# EAGLE board SparkFun_6DoF_LSM6DSO-Panel (EAGLE 9.6.2), part 1 of 4
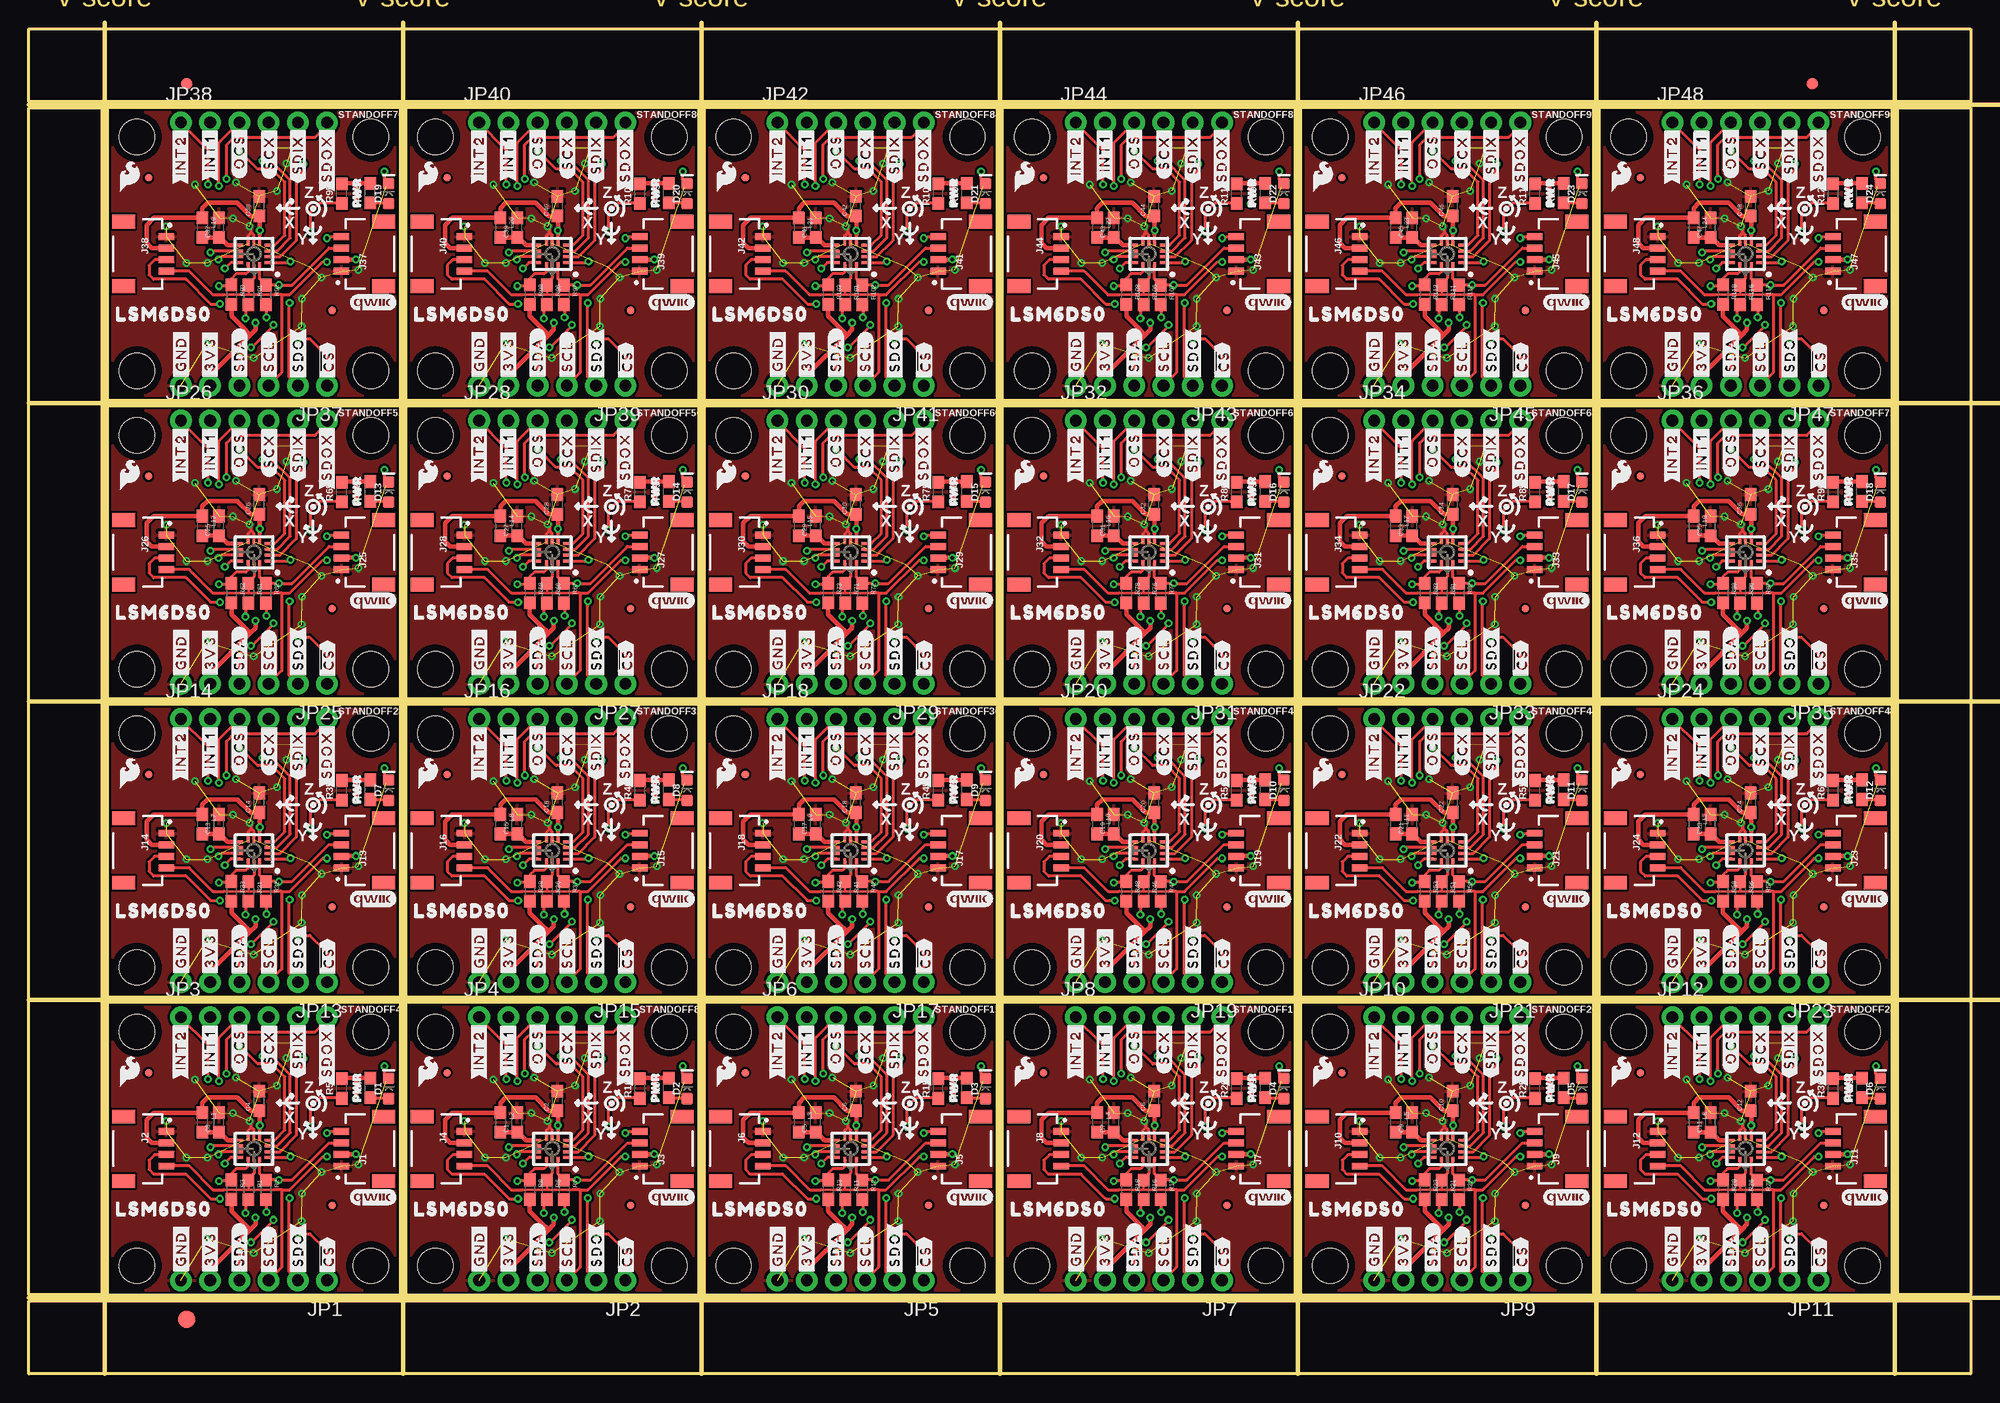
[diagram p0: board, top side]
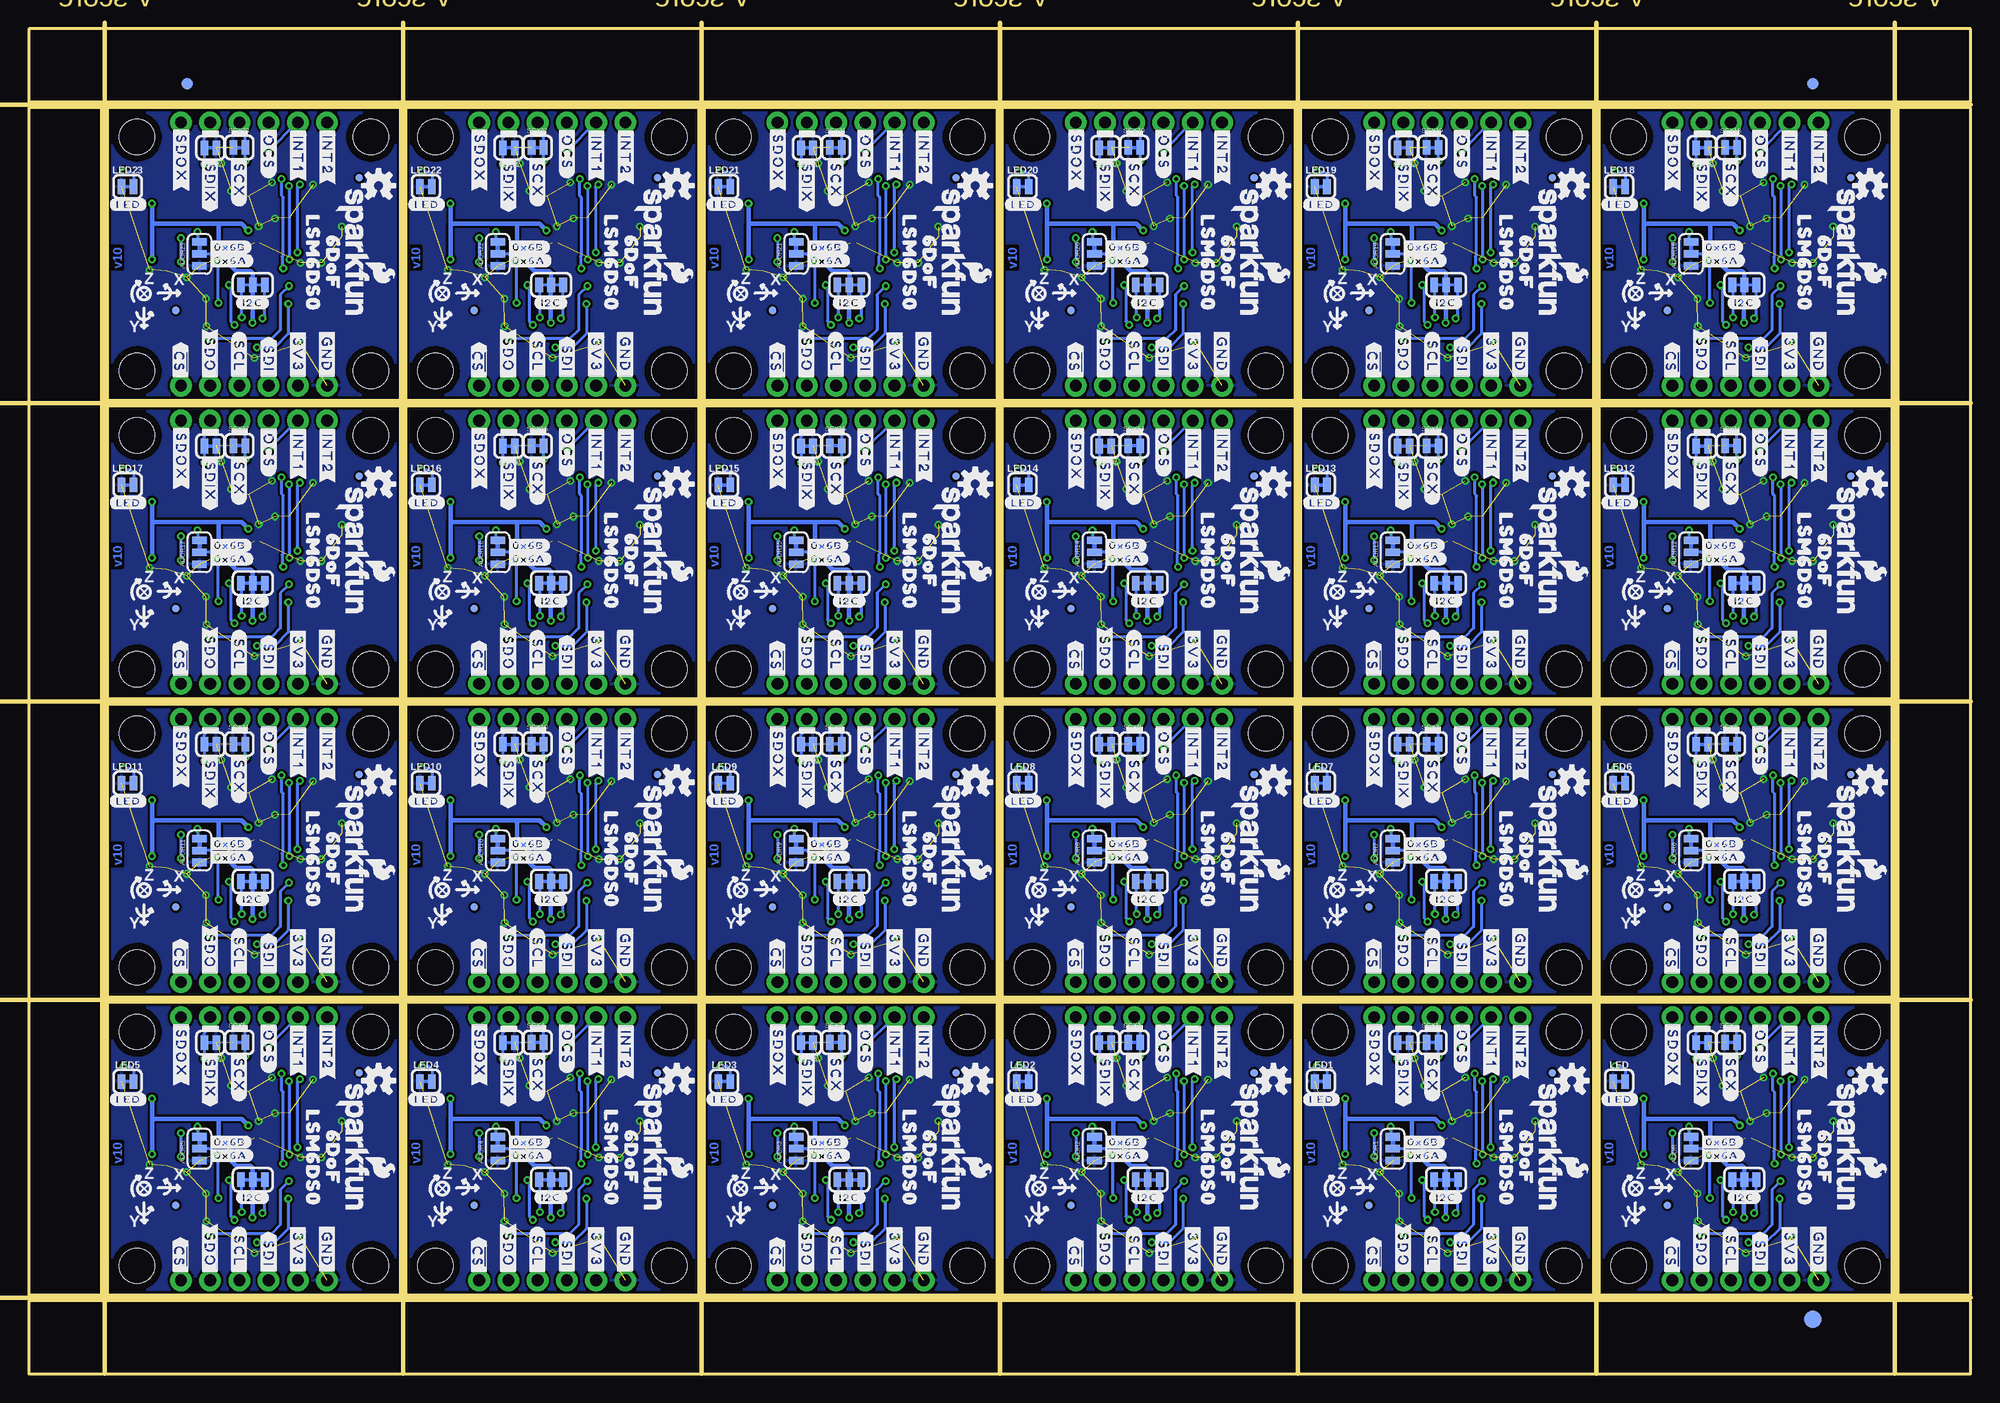
[diagram p1: board, bottom side, seen from below]

Size 168.66 x 116.84 mm. Coordinates in mm from the lower left corner, seen from the top.
Outline: 32.26,32.26 6.86,32.26 6.86,6.86 32.26,6.86 32.26,32.26
Outline: 58.17,32.26 32.77,32.26 32.77,6.86 58.17,6.86 58.17,32.26
Outline: 84.07,32.26 58.67,32.26 58.67,6.86 84.07,6.86 84.07,32.26
Outline: 109.98,32.26 84.58,32.26 84.58,6.86 109.98,6.86 109.98,32.26
Outline: 135.89,32.26 110.49,32.26 110.49,6.86 135.89,6.86 135.89,32.26
Outline: 161.8,32.26 136.4,32.26 136.4,6.86 161.8,6.86 161.8,32.26
Outline: 32.26,58.17 6.86,58.17 6.86,32.77 32.26,32.77 32.26,58.17
Outline: 58.17,58.17 32.77,58.17 32.77,32.77 58.17,32.77 58.17,58.17
Outline: 84.07,58.17 58.67,58.17 58.67,32.77 84.07,32.77 84.07,58.17
Outline: 109.98,58.17 84.58,58.17 84.58,32.77 109.98,32.77 109.98,58.17
Outline: 135.89,58.17 110.49,58.17 110.49,32.77 135.89,32.77 135.89,58.17
Outline: 161.8,58.17 136.4,58.17 136.4,32.77 161.8,32.77 161.8,58.17
Outline: 32.26,84.07 6.86,84.07 6.86,58.67 32.26,58.67 32.26,84.07
Outline: 58.17,84.07 32.77,84.07 32.77,58.67 58.17,58.67 58.17,84.07
Outline: 84.07,84.07 58.67,84.07 58.67,58.67 84.07,58.67 84.07,84.07
Outline: 109.98,84.07 84.58,84.07 84.58,58.67 109.98,58.67 109.98,84.07
Outline: 135.89,84.07 110.49,84.07 110.49,58.67 135.89,58.67 135.89,84.07
Outline: 161.8,84.07 136.4,84.07 136.4,58.67 161.8,58.67 161.8,84.07
Outline: 32.26,109.98 6.86,109.98 6.86,84.58 32.26,84.58 32.26,109.98
Outline: 58.17,109.98 32.77,109.98 32.77,84.58 58.17,84.58 58.17,109.98
Outline: 84.07,109.98 58.67,109.98 58.67,84.58 84.07,84.58 84.07,109.98
Outline: 109.98,109.98 84.58,109.98 84.58,84.58 109.98,84.58 109.98,109.98
Outline: 135.89,109.98 110.49,109.98 110.49,84.58 135.89,84.58 135.89,109.98
Outline: 161.8,109.98 136.4,109.98 136.4,84.58 161.8,84.58 161.8,109.98
Outline: 0,6.35 168.66,6.35 168.66,0 0,0 0,6.35
Outline: 162.31,109.98 168.66,109.98 168.66,6.86 162.31,6.86 162.31,109.98
Outline: 0,116.84 168.66,116.84 168.66,110.49 0,110.49 0,116.84
Outline: 0,109.98 6.35,109.98 6.35,6.86 0,6.86 0,109.98
Copper layers (1*16): Top 0.035mm / dielectric 1.5mm / Bottom 0.035mm
Design rules "SparkFun_6DoF_LSM6DSO": minimum track width 7mil, minimum drill 0.3mm, track to track 7mil, track to pad 7mil, pad to pad 7mil, via to via 7mil, smd to smd 7mil, copper to edge 7mil, drill to drill 7mil, minimum pad ring 7mil, minimum via ring 7mil, stop-mask expansion 3mil, vias tented up to drill 25mil, thermal gap 10mil
Milling: 12 lines

## Footprints (pad centres in the part's own frame; a part is rotated, then mirrored left to right if it is on the bottom)
SMT-JUMPER_3_1-NC_TRACE_SILK = smd 0.66 x 1.27: 1 -1.041,0; 2 0,0; 3 1.041,0
0603 = smd 1.1 x 1: 1 -0.85,0; 2 0.85,0
LED-0603 = smd 1 x 1: A -0.877,0; C 0.877,0
FIDUCIAL-1X2 = smd 1 x 1: 1 0,0
FIDUCIAL-1.5X3 = smd 1.5 x 1.5: 1 0,0
FIDUCIAL-MICRO = smd 0.635 x 0.635: 1 0,0
SMT-JUMPER_3_2-NC_TRACE_SILK = smd 0.66 x 1.27: 1 -1.041,0; 2 0,0; 3 1.041,0
JST04_1MM_RA = smd 0.6 x 1.35: 1 -1.5,0; 2 -0.5,0; 3 0.5,0; 4 1.5,0 | smd 1.2 x 2: NC1 2.8,-3.675; NC2 -2.8,-3.675
1X06_NO_SILK = drill 1.016 pad 1.88: 1 0,0; 2 2.54,0; 3 5.08,0; 4 7.62,0; 5 10.16,0; 6 12.7,0
SMT-JUMPER_2_NC_TRACE_SILK = smd 0.66 x 1.27: 1 -0.521,0; 2 0.521,0
STAND-OFF-TIGHT = hole 3.048: 0,0
LGA14L = smd 0.45 x 0.25: 1 -1.175,0.75; 2 -1.175,0.25; 3 -1.175,-0.25; 4 -1.175,-0.75; 8 1.175,-0.75; 9 1.175,-0.25; 10 1.175,0.25; 11 1.175,0.75 | smd 0.25 x 0.45: 5 -0.5,-0.925; 6 0,-0.925; 7 0.5,-0.925; 12 0.5,0.925; 13 0,0.925; 14 -0.5,0.925

## Placement (x,y rotation side)
ADDR  JUMPER-SMT_3_1-NC_TRACE_SILK  [SMT-JUMPER_3_1-NC_TRACE_SILK]  24.29,19.56 90 bottom
ADDR1  JUMPER-SMT_3_1-NC_TRACE_SILK  [SMT-JUMPER_3_1-NC_TRACE_SILK]  50.2,19.56 90 bottom
ADDR2  JUMPER-SMT_3_1-NC_TRACE_SILK  [SMT-JUMPER_3_1-NC_TRACE_SILK]  76.1,19.56 90 bottom
ADDR3  JUMPER-SMT_3_1-NC_TRACE_SILK  [SMT-JUMPER_3_1-NC_TRACE_SILK]  102.01,19.56 90 bottom
ADDR4  JUMPER-SMT_3_1-NC_TRACE_SILK  [SMT-JUMPER_3_1-NC_TRACE_SILK]  127.92,19.56 90 bottom
ADDR5  JUMPER-SMT_3_1-NC_TRACE_SILK  [SMT-JUMPER_3_1-NC_TRACE_SILK]  153.83,19.56 90 bottom
ADDR6  JUMPER-SMT_3_1-NC_TRACE_SILK  [SMT-JUMPER_3_1-NC_TRACE_SILK]  24.29,45.47 90 bottom
ADDR7  JUMPER-SMT_3_1-NC_TRACE_SILK  [SMT-JUMPER_3_1-NC_TRACE_SILK]  50.2,45.47 90 bottom
ADDR8  JUMPER-SMT_3_1-NC_TRACE_SILK  [SMT-JUMPER_3_1-NC_TRACE_SILK]  76.1,45.47 90 bottom
ADDR9  JUMPER-SMT_3_1-NC_TRACE_SILK  [SMT-JUMPER_3_1-NC_TRACE_SILK]  102.01,45.47 90 bottom
ADDR10  JUMPER-SMT_3_1-NC_TRACE_SILK  [SMT-JUMPER_3_1-NC_TRACE_SILK]  127.92,45.47 90 bottom
ADDR11  JUMPER-SMT_3_1-NC_TRACE_SILK  [SMT-JUMPER_3_1-NC_TRACE_SILK]  153.83,45.47 90 bottom
ADDR12  JUMPER-SMT_3_1-NC_TRACE_SILK  [SMT-JUMPER_3_1-NC_TRACE_SILK]  24.29,71.37 90 bottom
ADDR13  JUMPER-SMT_3_1-NC_TRACE_SILK  [SMT-JUMPER_3_1-NC_TRACE_SILK]  50.2,71.37 90 bottom
ADDR14  JUMPER-SMT_3_1-NC_TRACE_SILK  [SMT-JUMPER_3_1-NC_TRACE_SILK]  76.1,71.37 90 bottom
ADDR15  JUMPER-SMT_3_1-NC_TRACE_SILK  [SMT-JUMPER_3_1-NC_TRACE_SILK]  102.01,71.37 90 bottom
ADDR16  JUMPER-SMT_3_1-NC_TRACE_SILK  [SMT-JUMPER_3_1-NC_TRACE_SILK]  127.92,71.37 90 bottom
ADDR17  JUMPER-SMT_3_1-NC_TRACE_SILK  [SMT-JUMPER_3_1-NC_TRACE_SILK]  153.83,71.37 90 bottom
ADDR18  JUMPER-SMT_3_1-NC_TRACE_SILK  [SMT-JUMPER_3_1-NC_TRACE_SILK]  24.29,97.28 90 bottom
ADDR19  JUMPER-SMT_3_1-NC_TRACE_SILK  [SMT-JUMPER_3_1-NC_TRACE_SILK]  50.2,97.28 90 bottom
ADDR20  JUMPER-SMT_3_1-NC_TRACE_SILK  [SMT-JUMPER_3_1-NC_TRACE_SILK]  76.1,97.28 90 bottom
ADDR21  JUMPER-SMT_3_1-NC_TRACE_SILK  [SMT-JUMPER_3_1-NC_TRACE_SILK]  102.01,97.28 90 bottom
ADDR22  JUMPER-SMT_3_1-NC_TRACE_SILK  [SMT-JUMPER_3_1-NC_TRACE_SILK]  127.92,97.28 90 bottom
ADDR23  JUMPER-SMT_3_1-NC_TRACE_SILK  [SMT-JUMPER_3_1-NC_TRACE_SILK]  153.83,97.28 90 bottom
C1  0.1uF  [0603]  42.43,21.84 90 top
C2  0.1uF  [0603]  45.92,23.71 90 top
C3  0.1uF  [0603]  16.52,21.84 90 top
C4  0.1uF  [0603]  20.02,23.71 90 top
C5  0.1uF  [0603]  68.34,21.84 90 top
C6  0.1uF  [0603]  71.83,23.71 90 top
C7  0.1uF  [0603]  94.25,21.84 90 top
C8  0.1uF  [0603]  97.74,23.71 90 top
C9  0.1uF  [0603]  120.15,21.84 90 top
C10  0.1uF  [0603]  123.65,23.71 90 top
C11  0.1uF  [0603]  146.06,21.84 90 top
C12  0.1uF  [0603]  149.56,23.71 90 top
C13  0.1uF  [0603]  16.52,47.75 90 top
C14  0.1uF  [0603]  20.02,49.62 90 top
C15  0.1uF  [0603]  42.43,47.75 90 top
C16  0.1uF  [0603]  45.92,49.62 90 top
C17  0.1uF  [0603]  68.34,47.75 90 top
C18  0.1uF  [0603]  71.83,49.62 90 top
C19  0.1uF  [0603]  94.25,47.75 90 top
C20  0.1uF  [0603]  97.74,49.62 90 top
C21  0.1uF  [0603]  120.15,47.75 90 top
C22  0.1uF  [0603]  123.65,49.62 90 top
C23  0.1uF  [0603]  146.06,47.75 90 top
C24  0.1uF  [0603]  149.56,49.62 90 top
C25  0.1uF  [0603]  16.52,73.66 90 top
C26  0.1uF  [0603]  20.02,75.53 90 top
C27  0.1uF  [0603]  42.43,73.66 90 top
C28  0.1uF  [0603]  45.92,75.53 90 top
C29  0.1uF  [0603]  68.34,73.66 90 top
C30  0.1uF  [0603]  71.83,75.53 90 top
C31  0.1uF  [0603]  94.25,73.66 90 top
C32  0.1uF  [0603]  97.74,75.53 90 top
C33  0.1uF  [0603]  120.15,73.66 90 top
C34  0.1uF  [0603]  123.65,75.53 90 top
C35  0.1uF  [0603]  146.06,73.66 90 top
C36  0.1uF  [0603]  149.56,75.53 90 top
C37  0.1uF  [0603]  16.52,99.57 90 top
C38  0.1uF  [0603]  20.02,101.43 90 top
C39  0.1uF  [0603]  42.43,99.57 90 top
C40  0.1uF  [0603]  45.92,101.43 90 top
C41  0.1uF  [0603]  68.34,99.57 90 top
C42  0.1uF  [0603]  71.83,101.43 90 top
C43  0.1uF  [0603]  94.25,99.57 90 top
C44  0.1uF  [0603]  97.74,101.43 90 top
C45  0.1uF  [0603]  120.15,99.57 90 top
C46  0.1uF  [0603]  123.65,101.43 90 top
C47  0.1uF  [0603]  146.06,99.57 90 top
C48  0.1uF  [0603]  149.56,101.43 90 top
D1  [LED-0603]  31.27,24.79 90 top
D2  [LED-0603]  57.18,24.79 90 top
D3  [LED-0603]  83.08,24.79 90 top
D4  [LED-0603]  108.99,24.79 90 top
D5  [LED-0603]  134.9,24.79 90 top
D6  [LED-0603]  160.81,24.79 90 top
D7  [LED-0603]  31.27,50.7 90 top
D8  [LED-0603]  57.18,50.7 90 top
D9  [LED-0603]  83.08,50.7 90 top
D10  [LED-0603]  108.99,50.7 90 top
D11  [LED-0603]  134.9,50.7 90 top
D12  [LED-0603]  160.81,50.7 90 top
D13  [LED-0603]  31.27,76.61 90 top
D14  [LED-0603]  57.18,76.61 90 top
D15  [LED-0603]  83.08,76.61 90 top
D16  [LED-0603]  108.99,76.61 90 top
D17  [LED-0603]  134.9,76.61 90 top
D18  [LED-0603]  160.81,76.61 90 top
D19  [LED-0603]  31.27,102.51 90 top
D20  [LED-0603]  57.18,102.51 90 top
D21  [LED-0603]  83.08,102.51 90 top
D22  [LED-0603]  108.99,102.51 90 top
D23  [LED-0603]  134.9,102.51 90 top
D24  [LED-0603]  160.81,102.51 90 top
E$1  [FIDUCIAL-1X2]  13.72,112.08 0 top
E$2  [FIDUCIAL-1X2]  13.72,112.08 0 bottom
E$3  [FIDUCIAL-1X2]  154.88,112.08 0 top
E$4  [FIDUCIAL-1X2]  154.88,112.08 0 bottom
E$5  [FIDUCIAL-1.5X3]  13.72,4.76 0 top
E$6  [FIDUCIAL-1.5X3]  13.72,4.76 0 bottom
FD1  FIDUCIALUFIDUCIAL  [FIDUCIAL-MICRO]  10.41,26.16 0 bottom
FD2  FIDUCIALUFIDUCIAL  [FIDUCIAL-MICRO]  26.34,14.66 0 bottom
FD3  FIDUCIALUFIDUCIAL  [FIDUCIAL-MICRO]  36.32,26.16 0 bottom
FD4  FIDUCIALUFIDUCIAL  [FIDUCIAL-MICRO]  52.25,14.66 0 bottom
FD5  FIDUCIALUFIDUCIAL  [FIDUCIAL-MICRO]  62.23,26.16 0 bottom
FD6  FIDUCIALUFIDUCIAL  [FIDUCIAL-MICRO]  78.16,14.66 0 bottom
FD7  FIDUCIALUFIDUCIAL  [FIDUCIAL-MICRO]  88.14,26.16 0 bottom
FD8  FIDUCIALUFIDUCIAL  [FIDUCIAL-MICRO]  104.06,14.66 0 bottom
FD9  FIDUCIALUFIDUCIAL  [FIDUCIAL-MICRO]  114.05,26.16 0 bottom
FD10  FIDUCIALUFIDUCIAL  [FIDUCIAL-MICRO]  129.97,14.66 0 bottom
FD11  FIDUCIALUFIDUCIAL  [FIDUCIAL-MICRO]  139.95,26.16 0 bottom
FD12  FIDUCIALUFIDUCIAL  [FIDUCIAL-MICRO]  155.88,14.66 0 bottom
FD13  FIDUCIALUFIDUCIAL  [FIDUCIAL-MICRO]  10.41,52.07 0 bottom
FD14  FIDUCIALUFIDUCIAL  [FIDUCIAL-MICRO]  26.34,40.56 0 bottom
FD15  FIDUCIALUFIDUCIAL  [FIDUCIAL-MICRO]  36.32,52.07 0 bottom
FD16  FIDUCIALUFIDUCIAL  [FIDUCIAL-MICRO]  52.25,40.56 0 bottom
FD17  FIDUCIALUFIDUCIAL  [FIDUCIAL-MICRO]  62.23,52.07 0 bottom
FD18  FIDUCIALUFIDUCIAL  [FIDUCIAL-MICRO]  78.16,40.56 0 bottom
FD19  FIDUCIALUFIDUCIAL  [FIDUCIAL-MICRO]  88.14,52.07 0 bottom
FD20  FIDUCIALUFIDUCIAL  [FIDUCIAL-MICRO]  104.06,40.56 0 bottom
FD21  FIDUCIALUFIDUCIAL  [FIDUCIAL-MICRO]  114.05,52.07 0 bottom
FD22  FIDUCIALUFIDUCIAL  [FIDUCIAL-MICRO]  129.97,40.56 0 bottom
FD23  FIDUCIALUFIDUCIAL  [FIDUCIAL-MICRO]  139.95,52.07 0 bottom
FD24  FIDUCIALUFIDUCIAL  [FIDUCIAL-MICRO]  155.88,40.56 0 bottom
FD25  FIDUCIALUFIDUCIAL  [FIDUCIAL-MICRO]  10.41,77.98 0 bottom
FD26  FIDUCIALUFIDUCIAL  [FIDUCIAL-MICRO]  26.34,66.47 0 bottom
FD27  FIDUCIALUFIDUCIAL  [FIDUCIAL-MICRO]  36.32,77.98 0 bottom
FD28  FIDUCIALUFIDUCIAL  [FIDUCIAL-MICRO]  52.25,66.47 0 bottom
FD29  FIDUCIALUFIDUCIAL  [FIDUCIAL-MICRO]  62.23,77.98 0 bottom
FD30  FIDUCIALUFIDUCIAL  [FIDUCIAL-MICRO]  78.16,66.47 0 bottom
FD31  FIDUCIALUFIDUCIAL  [FIDUCIAL-MICRO]  88.14,77.98 0 bottom
FD32  FIDUCIALUFIDUCIAL  [FIDUCIAL-MICRO]  104.06,66.47 0 bottom
FD33  FIDUCIALUFIDUCIAL  [FIDUCIAL-MICRO]  114.05,77.98 0 bottom
FD34  FIDUCIALUFIDUCIAL  [FIDUCIAL-MICRO]  129.97,66.47 0 bottom
FD35  FIDUCIALUFIDUCIAL  [FIDUCIAL-MICRO]  139.95,77.98 0 bottom
FD36  FIDUCIALUFIDUCIAL  [FIDUCIAL-MICRO]  155.88,66.47 0 bottom
FD37  FIDUCIALUFIDUCIAL  [FIDUCIAL-MICRO]  10.41,103.89 0 bottom
FD38  FIDUCIALUFIDUCIAL  [FIDUCIAL-MICRO]  26.34,92.38 0 bottom
FD39  FIDUCIALUFIDUCIAL  [FIDUCIAL-MICRO]  36.32,103.89 0 bottom
FD40  FIDUCIALUFIDUCIAL  [FIDUCIAL-MICRO]  52.25,92.38 0 bottom
FD41  FIDUCIALUFIDUCIAL  [FIDUCIAL-MICRO]  62.23,103.89 0 bottom
FD42  FIDUCIALUFIDUCIAL  [FIDUCIAL-MICRO]  78.16,92.38 0 bottom
FD43  FIDUCIALUFIDUCIAL  [FIDUCIAL-MICRO]  88.14,103.89 0 bottom
FD44  FIDUCIALUFIDUCIAL  [FIDUCIAL-MICRO]  104.06,92.38 0 bottom
FD45  FIDUCIALUFIDUCIAL  [FIDUCIAL-MICRO]  114.05,103.89 0 bottom
FD46  FIDUCIALUFIDUCIAL  [FIDUCIAL-MICRO]  129.97,92.38 0 bottom
FD47  FIDUCIALUFIDUCIAL  [FIDUCIAL-MICRO]  139.95,103.89 0 bottom
FD48  FIDUCIALUFIDUCIAL  [FIDUCIAL-MICRO]  155.88,92.38 0 bottom
FID1  FIDUCIALUFIDUCIAL  [FIDUCIAL-MICRO]  10.41,26.16 0 top
FID2  FIDUCIALUFIDUCIAL  [FIDUCIAL-MICRO]  26.34,14.66 0 top
FID3  FIDUCIALUFIDUCIAL  [FIDUCIAL-MICRO]  36.32,26.16 0 top
FID4  FIDUCIALUFIDUCIAL  [FIDUCIAL-MICRO]  52.25,14.66 0 top
FID5  FIDUCIALUFIDUCIAL  [FIDUCIAL-MICRO]  62.23,26.16 0 top
FID6  FIDUCIALUFIDUCIAL  [FIDUCIAL-MICRO]  78.16,14.66 0 top
FID7  FIDUCIALUFIDUCIAL  [FIDUCIAL-MICRO]  88.14,26.16 0 top
FID8  FIDUCIALUFIDUCIAL  [FIDUCIAL-MICRO]  104.06,14.66 0 top
FID9  FIDUCIALUFIDUCIAL  [FIDUCIAL-MICRO]  114.05,26.16 0 top
FID10  FIDUCIALUFIDUCIAL  [FIDUCIAL-MICRO]  129.97,14.66 0 top
FID11  FIDUCIALUFIDUCIAL  [FIDUCIAL-MICRO]  139.95,26.16 0 top
FID12  FIDUCIALUFIDUCIAL  [FIDUCIAL-MICRO]  155.88,14.66 0 top
FID13  FIDUCIALUFIDUCIAL  [FIDUCIAL-MICRO]  10.41,52.07 0 top
FID14  FIDUCIALUFIDUCIAL  [FIDUCIAL-MICRO]  26.34,40.56 0 top
FID15  FIDUCIALUFIDUCIAL  [FIDUCIAL-MICRO]  36.32,52.07 0 top
FID16  FIDUCIALUFIDUCIAL  [FIDUCIAL-MICRO]  52.25,40.56 0 top
FID17  FIDUCIALUFIDUCIAL  [FIDUCIAL-MICRO]  62.23,52.07 0 top
FID18  FIDUCIALUFIDUCIAL  [FIDUCIAL-MICRO]  78.16,40.56 0 top
FID19  FIDUCIALUFIDUCIAL  [FIDUCIAL-MICRO]  88.14,52.07 0 top
FID20  FIDUCIALUFIDUCIAL  [FIDUCIAL-MICRO]  104.06,40.56 0 top
FID21  FIDUCIALUFIDUCIAL  [FIDUCIAL-MICRO]  114.05,52.07 0 top
FID22  FIDUCIALUFIDUCIAL  [FIDUCIAL-MICRO]  129.97,40.56 0 top
FID23  FIDUCIALUFIDUCIAL  [FIDUCIAL-MICRO]  139.95,52.07 0 top
FID24  FIDUCIALUFIDUCIAL  [FIDUCIAL-MICRO]  155.88,40.56 0 top
FID25  FIDUCIALUFIDUCIAL  [FIDUCIAL-MICRO]  10.41,77.98 0 top
FID26  FIDUCIALUFIDUCIAL  [FIDUCIAL-MICRO]  26.34,66.47 0 top
FID27  FIDUCIALUFIDUCIAL  [FIDUCIAL-MICRO]  36.32,77.98 0 top
FID28  FIDUCIALUFIDUCIAL  [FIDUCIAL-MICRO]  52.25,66.47 0 top
FID29  FIDUCIALUFIDUCIAL  [FIDUCIAL-MICRO]  62.23,77.98 0 top
FID30  FIDUCIALUFIDUCIAL  [FIDUCIAL-MICRO]  78.16,66.47 0 top
FID31  FIDUCIALUFIDUCIAL  [FIDUCIAL-MICRO]  88.14,77.98 0 top
FID32  FIDUCIALUFIDUCIAL  [FIDUCIAL-MICRO]  104.06,66.47 0 top
FID33  FIDUCIALUFIDUCIAL  [FIDUCIAL-MICRO]  114.05,77.98 0 top
FID34  FIDUCIALUFIDUCIAL  [FIDUCIAL-MICRO]  129.97,66.47 0 top
FID35  FIDUCIALUFIDUCIAL  [FIDUCIAL-MICRO]  139.95,77.98 0 top
FID36  FIDUCIALUFIDUCIAL  [FIDUCIAL-MICRO]  155.88,66.47 0 top
FID37  FIDUCIALUFIDUCIAL  [FIDUCIAL-MICRO]  10.41,103.89 0 top
FID38  FIDUCIALUFIDUCIAL  [FIDUCIAL-MICRO]  26.34,92.38 0 top
FID39  FIDUCIALUFIDUCIAL  [FIDUCIAL-MICRO]  36.32,103.89 0 top
FID40  FIDUCIALUFIDUCIAL  [FIDUCIAL-MICRO]  52.25,92.38 0 top
FID41  FIDUCIALUFIDUCIAL  [FIDUCIAL-MICRO]  62.23,103.89 0 top
FID42  FIDUCIALUFIDUCIAL  [FIDUCIAL-MICRO]  78.16,92.38 0 top
FID43  FIDUCIALUFIDUCIAL  [FIDUCIAL-MICRO]  88.14,103.89 0 top
FID44  FIDUCIALUFIDUCIAL  [FIDUCIAL-MICRO]  104.06,92.38 0 top
FID45  FIDUCIALUFIDUCIAL  [FIDUCIAL-MICRO]  114.05,103.89 0 top
FID46  FIDUCIALUFIDUCIAL  [FIDUCIAL-MICRO]  129.97,92.38 0 top
FID47  FIDUCIALUFIDUCIAL  [FIDUCIAL-MICRO]  139.95,103.89 0 top
FID48  FIDUCIALUFIDUCIAL  [FIDUCIAL-MICRO]  155.88,92.38 0 top
I2C_PU  S_MODE  [SMT-JUMPER_3_2-NC_TRACE_SILK]  19.66,16.87 180 bottom
I2C_PU1  S_MODE  [SMT-JUMPER_3_2-NC_TRACE_SILK]  45.57,16.87 180 bottom
I2C_PU2  S_MODE  [SMT-JUMPER_3_2-NC_TRACE_SILK]  71.48,16.87 180 bottom
I2C_PU3  S_MODE  [SMT-JUMPER_3_2-NC_TRACE_SILK]  97.38,16.87 180 bottom
I2C_PU4  S_MODE  [SMT-JUMPER_3_2-NC_TRACE_SILK]  123.29,16.87 180 bottom
I2C_PU5  S_MODE  [SMT-JUMPER_3_2-NC_TRACE_SILK]  149.2,16.87 180 bottom
I2C_PU6  S_MODE  [SMT-JUMPER_3_2-NC_TRACE_SILK]  19.66,42.78 180 bottom
I2C_PU7  S_MODE  [SMT-JUMPER_3_2-NC_TRACE_SILK]  45.57,42.78 180 bottom
I2C_PU8  S_MODE  [SMT-JUMPER_3_2-NC_TRACE_SILK]  71.48,42.78 180 bottom
I2C_PU9  S_MODE  [SMT-JUMPER_3_2-NC_TRACE_SILK]  97.38,42.78 180 bottom
I2C_PU10  S_MODE  [SMT-JUMPER_3_2-NC_TRACE_SILK]  123.29,42.78 180 bottom
I2C_PU11  S_MODE  [SMT-JUMPER_3_2-NC_TRACE_SILK]  149.2,42.78 180 bottom
I2C_PU12  S_MODE  [SMT-JUMPER_3_2-NC_TRACE_SILK]  19.66,68.69 180 bottom
I2C_PU13  S_MODE  [SMT-JUMPER_3_2-NC_TRACE_SILK]  45.57,68.69 180 bottom
I2C_PU14  S_MODE  [SMT-JUMPER_3_2-NC_TRACE_SILK]  71.48,68.69 180 bottom
I2C_PU15  S_MODE  [SMT-JUMPER_3_2-NC_TRACE_SILK]  97.38,68.69 180 bottom
I2C_PU16  S_MODE  [SMT-JUMPER_3_2-NC_TRACE_SILK]  123.29,68.69 180 bottom
I2C_PU17  S_MODE  [SMT-JUMPER_3_2-NC_TRACE_SILK]  149.2,68.69 180 bottom
I2C_PU18  S_MODE  [SMT-JUMPER_3_2-NC_TRACE_SILK]  19.66,94.6 180 bottom
I2C_PU19  S_MODE  [SMT-JUMPER_3_2-NC_TRACE_SILK]  45.57,94.6 180 bottom
I2C_PU20  S_MODE  [SMT-JUMPER_3_2-NC_TRACE_SILK]  71.48,94.6 180 bottom
I2C_PU21  S_MODE  [SMT-JUMPER_3_2-NC_TRACE_SILK]  97.38,94.6 180 bottom
I2C_PU22  S_MODE  [SMT-JUMPER_3_2-NC_TRACE_SILK]  123.29,94.6 180 bottom
I2C_PU23  S_MODE  [SMT-JUMPER_3_2-NC_TRACE_SILK]  149.2,94.6 180 bottom
J1  QWIIC_RIGHT_ANGLE  [JST04_1MM_RA]  27.15,19.56 90 top
J2  QWIIC_RIGHT_ANGLE  [JST04_1MM_RA]  11.94,19.56 270 top
J3  QWIIC_RIGHT_ANGLE  [JST04_1MM_RA]  53.06,19.56 90 top
J4  QWIIC_RIGHT_ANGLE  [JST04_1MM_RA]  37.85,19.56 270 top
J5  QWIIC_RIGHT_ANGLE  [JST04_1MM_RA]  78.97,19.56 90 top
J6  QWIIC_RIGHT_ANGLE  [JST04_1MM_RA]  63.75,19.56 270 top
J7  QWIIC_RIGHT_ANGLE  [JST04_1MM_RA]  104.88,19.56 90 top
J8  QWIIC_RIGHT_ANGLE  [JST04_1MM_RA]  89.66,19.56 270 top
J9  QWIIC_RIGHT_ANGLE  [JST04_1MM_RA]  130.78,19.56 90 top
J10  QWIIC_RIGHT_ANGLE  [JST04_1MM_RA]  115.57,19.56 270 top
J11  QWIIC_RIGHT_ANGLE  [JST04_1MM_RA]  156.69,19.56 90 top
J12  QWIIC_RIGHT_ANGLE  [JST04_1MM_RA]  141.48,19.56 270 top
J13  QWIIC_RIGHT_ANGLE  [JST04_1MM_RA]  27.15,45.47 90 top
J14  QWIIC_RIGHT_ANGLE  [JST04_1MM_RA]  11.94,45.47 270 top
J15  QWIIC_RIGHT_ANGLE  [JST04_1MM_RA]  53.06,45.47 90 top
J16  QWIIC_RIGHT_ANGLE  [JST04_1MM_RA]  37.85,45.47 270 top
J17  QWIIC_RIGHT_ANGLE  [JST04_1MM_RA]  78.97,45.47 90 top
J18  QWIIC_RIGHT_ANGLE  [JST04_1MM_RA]  63.75,45.47 270 top
J19  QWIIC_RIGHT_ANGLE  [JST04_1MM_RA]  104.88,45.47 90 top
J20  QWIIC_RIGHT_ANGLE  [JST04_1MM_RA]  89.66,45.47 270 top
J21  QWIIC_RIGHT_ANGLE  [JST04_1MM_RA]  130.78,45.47 90 top
J22  QWIIC_RIGHT_ANGLE  [JST04_1MM_RA]  115.57,45.47 270 top
J23  QWIIC_RIGHT_ANGLE  [JST04_1MM_RA]  156.69,45.47 90 top
J24  QWIIC_RIGHT_ANGLE  [JST04_1MM_RA]  141.48,45.47 270 top
J25  QWIIC_RIGHT_ANGLE  [JST04_1MM_RA]  27.15,71.37 90 top
J26  QWIIC_RIGHT_ANGLE  [JST04_1MM_RA]  11.94,71.37 270 top
J27  QWIIC_RIGHT_ANGLE  [JST04_1MM_RA]  53.06,71.37 90 top
J28  QWIIC_RIGHT_ANGLE  [JST04_1MM_RA]  37.85,71.37 270 top
J29  QWIIC_RIGHT_ANGLE  [JST04_1MM_RA]  78.97,71.37 90 top
J30  QWIIC_RIGHT_ANGLE  [JST04_1MM_RA]  63.75,71.37 270 top
J31  QWIIC_RIGHT_ANGLE  [JST04_1MM_RA]  104.88,71.37 90 top
J32  QWIIC_RIGHT_ANGLE  [JST04_1MM_RA]  89.66,71.37 270 top
J33  QWIIC_RIGHT_ANGLE  [JST04_1MM_RA]  130.78,71.37 90 top
J34  QWIIC_RIGHT_ANGLE  [JST04_1MM_RA]  115.57,71.37 270 top
J35  QWIIC_RIGHT_ANGLE  [JST04_1MM_RA]  156.69,71.37 90 top
J36  QWIIC_RIGHT_ANGLE  [JST04_1MM_RA]  141.48,71.37 270 top
J37  QWIIC_RIGHT_ANGLE  [JST04_1MM_RA]  27.15,97.28 90 top
J38  QWIIC_RIGHT_ANGLE  [JST04_1MM_RA]  11.94,97.28 270 top
J39  QWIIC_RIGHT_ANGLE  [JST04_1MM_RA]  53.06,97.28 90 top
J40  QWIIC_RIGHT_ANGLE  [JST04_1MM_RA]  37.85,97.28 270 top
J41  QWIIC_RIGHT_ANGLE  [JST04_1MM_RA]  78.97,97.28 90 top
J42  QWIIC_RIGHT_ANGLE  [JST04_1MM_RA]  63.75,97.28 270 top
J43  QWIIC_RIGHT_ANGLE  [JST04_1MM_RA]  104.88,97.28 90 top
J44  QWIIC_RIGHT_ANGLE  [JST04_1MM_RA]  89.66,97.28 270 top
J45  QWIIC_RIGHT_ANGLE  [JST04_1MM_RA]  130.78,97.28 90 top
J46  QWIIC_RIGHT_ANGLE  [JST04_1MM_RA]  115.57,97.28 270 top
J47  QWIIC_RIGHT_ANGLE  [JST04_1MM_RA]  156.69,97.28 90 top
J48  QWIIC_RIGHT_ANGLE  [JST04_1MM_RA]  141.48,97.28 270 top
JP1  IO  [1X06_NO_SILK]  25.91,8.13 180 top
JP2  IO  [1X06_NO_SILK]  51.82,8.13 180 top
JP3  IO  [1X06_NO_SILK]  13.21,30.99 0 top
JP4  IO  [1X06_NO_SILK]  39.12,30.99 0 top
JP5  IO  [1X06_NO_SILK]  77.72,8.13 180 top
JP6  IO  [1X06_NO_SILK]  65.02,30.99 0 top
JP7  IO  [1X06_NO_SILK]  103.63,8.13 180 top
JP8  IO  [1X06_NO_SILK]  90.93,30.99 0 top
JP9  IO  [1X06_NO_SILK]  129.54,8.13 180 top
JP10  IO  [1X06_NO_SILK]  116.84,30.99 0 top
JP11  IO  [1X06_NO_SILK]  155.45,8.13 180 top
JP12  IO  [1X06_NO_SILK]  142.75,30.99 0 top
JP13  IO  [1X06_NO_SILK]  25.91,34.04 180 top
JP14  IO  [1X06_NO_SILK]  13.21,56.9 0 top
JP15  IO  [1X06_NO_SILK]  51.82,34.04 180 top
JP16  IO  [1X06_NO_SILK]  39.12,56.9 0 top
JP17  IO  [1X06_NO_SILK]  77.72,34.04 180 top
JP18  IO  [1X06_NO_SILK]  65.02,56.9 0 top
JP19  IO  [1X06_NO_SILK]  103.63,34.04 180 top
JP20  IO  [1X06_NO_SILK]  90.93,56.9 0 top
JP21  IO  [1X06_NO_SILK]  129.54,34.04 180 top
JP22  IO  [1X06_NO_SILK]  116.84,56.9 0 top
JP23  IO  [1X06_NO_SILK]  155.45,34.04 180 top
JP24  IO  [1X06_NO_SILK]  142.75,56.9 0 top
JP25  IO  [1X06_NO_SILK]  25.91,59.94 180 top
JP26  IO  [1X06_NO_SILK]  13.21,82.8 0 top
JP27  IO  [1X06_NO_SILK]  51.82,59.94 180 top
JP28  IO  [1X06_NO_SILK]  39.12,82.8 0 top
JP29  IO  [1X06_NO_SILK]  77.72,59.94 180 top
JP30  IO  [1X06_NO_SILK]  65.02,82.8 0 top
JP31  IO  [1X06_NO_SILK]  103.63,59.94 180 top
JP32  IO  [1X06_NO_SILK]  90.93,82.8 0 top
JP33  IO  [1X06_NO_SILK]  129.54,59.94 180 top
JP34  IO  [1X06_NO_SILK]  116.84,82.8 0 top
JP35  IO  [1X06_NO_SILK]  155.45,59.94 180 top
JP36  IO  [1X06_NO_SILK]  142.75,82.8 0 top
JP37  IO  [1X06_NO_SILK]  25.91,85.85 180 top
JP38  IO  [1X06_NO_SILK]  13.21,108.71 0 top
JP39  IO  [1X06_NO_SILK]  51.82,85.85 180 top
JP40  IO  [1X06_NO_SILK]  39.12,108.71 0 top
JP41  IO  [1X06_NO_SILK]  77.72,85.85 180 top
JP42  IO  [1X06_NO_SILK]  65.02,108.71 0 top
JP43  IO  [1X06_NO_SILK]  103.63,85.85 180 top
JP44  IO  [1X06_NO_SILK]  90.93,108.71 0 top
JP45  IO  [1X06_NO_SILK]  129.54,85.85 180 top
JP46  IO  [1X06_NO_SILK]  116.84,108.71 0 top
JP47  IO  [1X06_NO_SILK]  155.45,85.85 180 top
JP48  IO  [1X06_NO_SILK]  142.75,108.71 0 top
L1  30Ω  [0603]  15.06,21.84 270 top
L2  30Ω  [0603]  40.97,21.84 270 top
L3  30Ω  [0603]  66.88,21.84 270 top
L4  30Ω  [0603]  92.79,21.84 270 top
L5  30Ω  [0603]  118.69,21.84 270 top
L6  30Ω  [0603]  144.6,21.84 270 top
L7  30Ω  [0603]  15.06,47.75 270 top
L8  30Ω  [0603]  40.97,47.75 270 top
L9  30Ω  [0603]  66.88,47.75 270 top
L10  30Ω  [0603]  92.79,47.75 270 top
L11  30Ω  [0603]  118.69,47.75 270 top
L12  30Ω  [0603]  144.6,47.75 270 top
L13  30Ω  [0603]  15.06,73.66 270 top
L14  30Ω  [0603]  40.97,73.66 270 top
L15  30Ω  [0603]  66.88,73.66 270 top
L16  30Ω  [0603]  92.79,73.66 270 top
L17  30Ω  [0603]  118.69,73.66 270 top
L18  30Ω  [0603]  144.6,73.66 270 top
L19  30Ω  [0603]  15.06,99.57 270 top
L20  30Ω  [0603]  40.97,99.57 270 top
L21  30Ω  [0603]  66.88,99.57 270 top
L22  30Ω  [0603]  92.79,99.57 270 top
L23  30Ω  [0603]  118.69,99.57 270 top
L24  30Ω  [0603]  144.6,99.57 270 top
LED  JUMPER-SMT_2_NC_TRACE_SILK  [SMT-JUMPER_2_NC_TRACE_SILK]  30.53,25.4 0 bottom
LED1  JUMPER-SMT_2_NC_TRACE_SILK  [SMT-JUMPER_2_NC_TRACE_SILK]  56.44,25.4 0 bottom
LED2  JUMPER-SMT_2_NC_TRACE_SILK  [SMT-JUMPER_2_NC_TRACE_SILK]  82.35,25.4 0 bottom
LED3  JUMPER-SMT_2_NC_TRACE_SILK  [SMT-JUMPER_2_NC_TRACE_SILK]  108.25,25.4 0 bottom
LED4  JUMPER-SMT_2_NC_TRACE_SILK  [SMT-JUMPER_2_NC_TRACE_SILK]  134.16,25.4 0 bottom
LED5  JUMPER-SMT_2_NC_TRACE_SILK  [SMT-JUMPER_2_NC_TRACE_SILK]  160.07,25.4 0 bottom
LED6  JUMPER-SMT_2_NC_TRACE_SILK  [SMT-JUMPER_2_NC_TRACE_SILK]  30.53,51.31 0 bottom
LED7  JUMPER-SMT_2_NC_TRACE_SILK  [SMT-JUMPER_2_NC_TRACE_SILK]  56.44,51.31 0 bottom
LED8  JUMPER-SMT_2_NC_TRACE_SILK  [SMT-JUMPER_2_NC_TRACE_SILK]  82.35,51.31 0 bottom
LED9  JUMPER-SMT_2_NC_TRACE_SILK  [SMT-JUMPER_2_NC_TRACE_SILK]  108.25,51.31 0 bottom
LED10  JUMPER-SMT_2_NC_TRACE_SILK  [SMT-JUMPER_2_NC_TRACE_SILK]  134.16,51.31 0 bottom
LED11  JUMPER-SMT_2_NC_TRACE_SILK  [SMT-JUMPER_2_NC_TRACE_SILK]  160.07,51.31 0 bottom
LED12  JUMPER-SMT_2_NC_TRACE_SILK  [SMT-JUMPER_2_NC_TRACE_SILK]  30.53,77.22 0 bottom
LED13  JUMPER-SMT_2_NC_TRACE_SILK  [SMT-JUMPER_2_NC_TRACE_SILK]  56.44,77.22 0 bottom
LED14  JUMPER-SMT_2_NC_TRACE_SILK  [SMT-JUMPER_2_NC_TRACE_SILK]  82.35,77.22 0 bottom
LED15  JUMPER-SMT_2_NC_TRACE_SILK  [SMT-JUMPER_2_NC_TRACE_SILK]  108.25,77.22 0 bottom
LED16  JUMPER-SMT_2_NC_TRACE_SILK  [SMT-JUMPER_2_NC_TRACE_SILK]  134.16,77.22 0 bottom
LED17  JUMPER-SMT_2_NC_TRACE_SILK  [SMT-JUMPER_2_NC_TRACE_SILK]  160.07,77.22 0 bottom
LED18  JUMPER-SMT_2_NC_TRACE_SILK  [SMT-JUMPER_2_NC_TRACE_SILK]  30.53,103.12 0 bottom
LED19  JUMPER-SMT_2_NC_TRACE_SILK  [SMT-JUMPER_2_NC_TRACE_SILK]  56.44,103.12 0 bottom
LED20  JUMPER-SMT_2_NC_TRACE_SILK  [SMT-JUMPER_2_NC_TRACE_SILK]  82.35,103.12 0 bottom
LED21  JUMPER-SMT_2_NC_TRACE_SILK  [SMT-JUMPER_2_NC_TRACE_SILK]  108.25,103.12 0 bottom
LED22  JUMPER-SMT_2_NC_TRACE_SILK  [SMT-JUMPER_2_NC_TRACE_SILK]  134.16,103.12 0 bottom
LED23  JUMPER-SMT_2_NC_TRACE_SILK  [SMT-JUMPER_2_NC_TRACE_SILK]  160.07,103.12 0 bottom
LOGO1  QWIIC_LOGO_4MM  [QWIIC_4MM]  29.92,15.34 0 top
LOGO2  OSHW-LOGOS  [OSHW-LOGO-S]  8.74,25.48 0 bottom
LOGO3  SFE_LOGO_NAME_FLAME.1_INCH  [SFE_LOGO_NAME_FLAME_.1]  10.98,19.64 270 bottom
LOGO4  OSHW-LOGOS  [OSHW-LOGO-S]  34.65,25.48 0 bottom
LOGO5  SFE_LOGO_NAME_FLAME.1_INCH  [SFE_LOGO_NAME_FLAME_.1]  36.88,19.64 270 bottom
LOGO6  QWIIC_LOGO_4MM  [QWIIC_4MM]  55.83,15.34 0 top
LOGO7  OSHW-LOGOS  [OSHW-LOGO-S]  60.55,25.48 0 bottom
LOGO8  SFE_LOGO_NAME_FLAME.1_INCH  [SFE_LOGO_NAME_FLAME_.1]  62.79,19.64 270 bottom
LOGO9  QWIIC_LOGO_4MM  [QWIIC_4MM]  81.74,15.34 0 top
LOGO10  OSHW-LOGOS  [OSHW-LOGO-S]  86.46,25.48 0 bottom
LOGO11  SFE_LOGO_NAME_FLAME.1_INCH  [SFE_LOGO_NAME_FLAME_.1]  88.7,19.64 270 bottom
LOGO12  QWIIC_LOGO_4MM  [QWIIC_4MM]  107.65,15.34 0 top
LOGO13  OSHW-LOGOS  [OSHW-LOGO-S]  112.37,25.48 0 bottom
LOGO14  SFE_LOGO_NAME_FLAME.1_INCH  [SFE_LOGO_NAME_FLAME_.1]  114.61,19.64 270 bottom
LOGO15  QWIIC_LOGO_4MM  [QWIIC_4MM]  133.55,15.34 0 top
LOGO16  OSHW-LOGOS  [OSHW-LOGO-S]  138.28,25.48 0 bottom
LOGO17  SFE_LOGO_NAME_FLAME.1_INCH  [SFE_LOGO_NAME_FLAME_.1]  140.52,19.64 270 bottom
LOGO18  QWIIC_LOGO_4MM  [QWIIC_4MM]  159.46,15.34 0 top
LOGO19  OSHW-LOGOS  [OSHW-LOGO-S]  8.74,51.39 0 bottom
LOGO20  SFE_LOGO_NAME_FLAME.1_INCH  [SFE_LOGO_NAME_FLAME_.1]  10.98,45.55 270 bottom
LOGO21  QWIIC_LOGO_4MM  [QWIIC_4MM]  29.92,41.25 0 top
LOGO22  OSHW-LOGOS  [OSHW-LOGO-S]  34.65,51.39 0 bottom
LOGO23  SFE_LOGO_NAME_FLAME.1_INCH  [SFE_LOGO_NAME_FLAME_.1]  36.88,45.55 270 bottom
LOGO24  QWIIC_LOGO_4MM  [QWIIC_4MM]  55.83,41.25 0 top
LOGO25  OSHW-LOGOS  [OSHW-LOGO-S]  60.55,51.39 0 bottom
LOGO26  SFE_LOGO_NAME_FLAME.1_INCH  [SFE_LOGO_NAME_FLAME_.1]  62.79,45.55 270 bottom
LOGO27  QWIIC_LOGO_4MM  [QWIIC_4MM]  81.74,41.25 0 top
LOGO28  OSHW-LOGOS  [OSHW-LOGO-S]  86.46,51.39 0 bottom
LOGO29  SFE_LOGO_NAME_FLAME.1_INCH  [SFE_LOGO_NAME_FLAME_.1]  88.7,45.55 270 bottom
LOGO30  QWIIC_LOGO_4MM  [QWIIC_4MM]  107.65,41.25 0 top
LOGO31  OSHW-LOGOS  [OSHW-LOGO-S]  112.37,51.39 0 bottom
LOGO32  SFE_LOGO_NAME_FLAME.1_INCH  [SFE_LOGO_NAME_FLAME_.1]  114.61,45.55 270 bottom
LOGO33  QWIIC_LOGO_4MM  [QWIIC_4MM]  133.55,41.25 0 top
LOGO34  OSHW-LOGOS  [OSHW-LOGO-S]  138.28,51.39 0 bottom
LOGO35  SFE_LOGO_NAME_FLAME.1_INCH  [SFE_LOGO_NAME_FLAME_.1]  140.52,45.55 270 bottom
LOGO36  QWIIC_LOGO_4MM  [QWIIC_4MM]  159.46,41.25 0 top
LOGO37  OSHW-LOGOS  [OSHW-LOGO-S]  8.74,77.3 0 bottom
LOGO38  SFE_LOGO_NAME_FLAME.1_INCH  [SFE_LOGO_NAME_FLAME_.1]  10.98,71.46 270 bottom
LOGO39  QWIIC_LOGO_4MM  [QWIIC_4MM]  29.92,67.16 0 top
LOGO40  OSHW-LOGOS  [OSHW-LOGO-S]  34.65,77.3 0 bottom
LOGO41  SFE_LOGO_NAME_FLAME.1_INCH  [SFE_LOGO_NAME_FLAME_.1]  36.88,71.46 270 bottom
LOGO42  QWIIC_LOGO_4MM  [QWIIC_4MM]  55.83,67.16 0 top
LOGO43  OSHW-LOGOS  [OSHW-LOGO-S]  60.55,77.3 0 bottom
LOGO44  SFE_LOGO_NAME_FLAME.1_INCH  [SFE_LOGO_NAME_FLAME_.1]  62.79,71.46 270 bottom
LOGO45  QWIIC_LOGO_4MM  [QWIIC_4MM]  81.74,67.16 0 top
LOGO46  OSHW-LOGOS  [OSHW-LOGO-S]  86.46,77.3 0 bottom
LOGO47  SFE_LOGO_NAME_FLAME.1_INCH  [SFE_LOGO_NAME_FLAME_.1]  88.7,71.46 270 bottom
LOGO48  QWIIC_LOGO_4MM  [QWIIC_4MM]  107.65,67.16 0 top
LOGO49  OSHW-LOGOS  [OSHW-LOGO-S]  112.37,77.3 0 bottom
LOGO50  SFE_LOGO_NAME_FLAME.1_INCH  [SFE_LOGO_NAME_FLAME_.1]  114.61,71.46 270 bottom
LOGO51  QWIIC_LOGO_4MM  [QWIIC_4MM]  133.55,67.16 0 top
LOGO52  OSHW-LOGOS  [OSHW-LOGO-S]  138.28,77.3 0 bottom
LOGO53  SFE_LOGO_NAME_FLAME.1_INCH  [SFE_LOGO_NAME_FLAME_.1]  140.52,71.46 270 bottom
LOGO54  QWIIC_LOGO_4MM  [QWIIC_4MM]  159.46,67.16 0 top
LOGO55  OSHW-LOGOS  [OSHW-LOGO-S]  8.74,103.21 0 bottom
LOGO56  SFE_LOGO_NAME_FLAME.1_INCH  [SFE_LOGO_NAME_FLAME_.1]  10.98,97.37 270 bottom
LOGO57  QWIIC_LOGO_4MM  [QWIIC_4MM]  29.92,93.07 0 top
LOGO58  OSHW-LOGOS  [OSHW-LOGO-S]  34.65,103.21 0 bottom
LOGO59  SFE_LOGO_NAME_FLAME.1_INCH  [SFE_LOGO_NAME_FLAME_.1]  36.88,97.37 270 bottom
LOGO60  QWIIC_LOGO_4MM  [QWIIC_4MM]  55.83,93.07 0 top
LOGO61  OSHW-LOGOS  [OSHW-LOGO-S]  60.55,103.21 0 bottom
LOGO62  SFE_LOGO_NAME_FLAME.1_INCH  [SFE_LOGO_NAME_FLAME_.1]  62.79,97.37 270 bottom
LOGO63  QWIIC_LOGO_4MM  [QWIIC_4MM]  81.74,93.07 0 top
LOGO64  OSHW-LOGOS  [OSHW-LOGO-S]  86.46,103.21 0 bottom
LOGO65  SFE_LOGO_NAME_FLAME.1_INCH  [SFE_LOGO_NAME_FLAME_.1]  88.7,97.37 270 bottom
LOGO66  QWIIC_LOGO_4MM  [QWIIC_4MM]  107.65,93.07 0 top
LOGO67  OSHW-LOGOS  [OSHW-LOGO-S]  112.37,103.21 0 bottom
LOGO68  SFE_LOGO_NAME_FLAME.1_INCH  [SFE_LOGO_NAME_FLAME_.1]  114.61,97.37 270 bottom
LOGO69  QWIIC_LOGO_4MM  [QWIIC_4MM]  133.55,93.07 0 top
LOGO70  OSHW-LOGOS  [OSHW-LOGO-S]  138.28,103.21 0 bottom
LOGO71  SFE_LOGO_NAME_FLAME.1_INCH  [SFE_LOGO_NAME_FLAME_.1]  140.52,97.37 270 bottom
LOGO72  QWIIC_LOGO_4MM  [QWIIC_4MM]  159.46,93.07 0 top
R1  4.7k  [0603]  19.09,16 270 top
R2  4.7k  [0603]  20.58,16 270 top
R3  10k  [0603]  17.6,16.01 270 top
R4  1k  [0603]  29.67,24.84 90 top
R5  100k  [0603]  27.18,24.79 90 top
R6  4.7k  [0603]  45,16 270 top
R7  4.7k  [0603]  46.49,16 270 top
R8  10k  [0603]  43.51,16.01 270 top
R9  1k  [0603]  55.58,24.84 90 top
R10  100k  [0603]  53.09,24.79 90 top
R11  4.7k  [0603]  70.91,16 270 top
R12  4.7k  [0603]  72.4,16 270 top
R13  10k  [0603]  69.42,16.01 270 top
R14  1k  [0603]  81.48,24.84 90 top
R15  100k  [0603]  78.99,24.79 90 top
R16  4.7k  [0603]  96.82,16 270 top
R17  4.7k  [0603]  98.3,16 270 top
R18  10k  [0603]  95.33,16.01 270 top
R19  1k  [0603]  107.39,24.84 90 top
R20  100k  [0603]  104.9,24.79 90 top
R21  4.7k  [0603]  122.73,16 270 top
R22  4.7k  [0603]  124.21,16 270 top
R23  10k  [0603]  121.23,16.01 270 top
R24  1k  [0603]  133.3,24.84 90 top
R25  100k  [0603]  130.81,24.79 90 top
R26  4.7k  [0603]  148.63,16 270 top
R27  4.7k  [0603]  150.12,16 270 top
R28  10k  [0603]  147.14,16.01 270 top
R29  1k  [0603]  159.21,24.84 90 top
R30  100k  [0603]  156.72,24.79 90 top
R31  4.7k  [0603]  19.09,41.91 270 top
R32  4.7k  [0603]  20.58,41.91 270 top
R33  10k  [0603]  17.6,41.92 270 top
R34  1k  [0603]  29.67,50.75 90 top
R35  100k  [0603]  27.18,50.7 90 top
R36  4.7k  [0603]  45,41.91 270 top
R37  4.7k  [0603]  46.49,41.91 270 top
R38  10k  [0603]  43.51,41.92 270 top
R39  1k  [0603]  55.58,50.75 90 top
R40  100k  [0603]  53.09,50.7 90 top
R41  4.7k  [0603]  70.91,41.91 270 top
R42  4.7k  [0603]  72.4,41.91 270 top
R43  10k  [0603]  69.42,41.92 270 top
R44  1k  [0603]  81.48,50.75 90 top
R45  100k  [0603]  78.99,50.7 90 top
R46  4.7k  [0603]  96.82,41.91 270 top
R47  4.7k  [0603]  98.3,41.91 270 top
R48  10k  [0603]  95.33,41.92 270 top
R49  1k  [0603]  107.39,50.75 90 top
R50  100k  [0603]  104.9,50.7 90 top
R51  4.7k  [0603]  122.73,41.91 270 top
R52  4.7k  [0603]  124.21,41.91 270 top
R53  10k  [0603]  121.23,41.92 270 top
R54  1k  [0603]  133.3,50.75 90 top
R55  100k  [0603]  130.81,50.7 90 top
R56  4.7k  [0603]  148.63,41.91 270 top
R57  4.7k  [0603]  150.12,41.91 270 top
R58  10k  [0603]  147.14,41.92 270 top
R59  1k  [0603]  159.21,50.75 90 top
R60  100k  [0603]  156.72,50.7 90 top
R61  4.7k  [0603]  19.09,67.82 270 top
R62  4.7k  [0603]  20.58,67.82 270 top
R63  10k  [0603]  17.6,67.83 270 top
R64  1k  [0603]  29.67,76.66 90 top
R65  100k  [0603]  27.18,76.61 90 top
R66  4.7k  [0603]  45,67.82 270 top
R67  4.7k  [0603]  46.49,67.82 270 top
R68  10k  [0603]  43.51,67.83 270 top
R69  1k  [0603]  55.58,76.66 90 top
R70  100k  [0603]  53.09,76.61 90 top
R71  4.7k  [0603]  70.91,67.82 270 top
R72  4.7k  [0603]  72.4,67.82 270 top
R73  10k  [0603]  69.42,67.83 270 top
R74  1k  [0603]  81.48,76.66 90 top
R75  100k  [0603]  78.99,76.61 90 top
R76  4.7k  [0603]  96.82,67.82 270 top
R77  4.7k  [0603]  98.3,67.82 270 top
R78  10k  [0603]  95.33,67.83 270 top
R79  1k  [0603]  107.39,76.66 90 top
R80  100k  [0603]  104.9,76.61 90 top
R81  4.7k  [0603]  122.73,67.82 270 top
R82  4.7k  [0603]  124.21,67.82 270 top
R83  10k  [0603]  121.23,67.83 270 top
R84  1k  [0603]  133.3,76.66 90 top
R85  100k  [0603]  130.81,76.61 90 top
R86  4.7k  [0603]  148.63,67.82 270 top
R87  4.7k  [0603]  150.12,67.82 270 top
R88  10k  [0603]  147.14,67.83 270 top
R89  1k  [0603]  159.21,76.66 90 top
R90  100k  [0603]  156.72,76.61 90 top
R91  4.7k  [0603]  19.09,93.73 270 top
R92  4.7k  [0603]  20.58,93.73 270 top
R93  10k  [0603]  17.6,93.74 270 top
R94  1k  [0603]  29.67,102.57 90 top
R95  100k  [0603]  27.18,102.51 90 top
R96  4.7k  [0603]  45,93.73 270 top
R97  4.7k  [0603]  46.49,93.73 270 top
R98  10k  [0603]  43.51,93.74 270 top
R99  1k  [0603]  55.58,102.57 90 top
R100  100k  [0603]  53.09,102.51 90 top
R101  4.7k  [0603]  70.91,93.73 270 top
R102  4.7k  [0603]  72.4,93.73 270 top
R103  10k  [0603]  69.42,93.74 270 top
R104  1k  [0603]  81.48,102.57 90 top
R105  100k  [0603]  78.99,102.51 90 top
R106  4.7k  [0603]  96.82,93.73 270 top
R107  4.7k  [0603]  98.3,93.73 270 top
R108  10k  [0603]  95.33,93.74 270 top
R109  1k  [0603]  107.39,102.57 90 top
R110  100k  [0603]  104.9,102.51 90 top
R111  4.7k  [0603]  122.73,93.73 270 top
R112  4.7k  [0603]  124.21,93.73 270 top
R113  10k  [0603]  121.23,93.74 270 top
R114  1k  [0603]  133.3,102.57 90 top
R115  100k  [0603]  130.81,102.51 90 top
R116  4.7k  [0603]  148.63,93.73 270 top
R117  4.7k  [0603]  150.12,93.73 270 top
R118  10k  [0603]  147.14,93.74 270 top
R119  1k  [0603]  159.21,102.57 90 top
R120  100k  [0603]  156.72,102.51 90 top
SCX  JUMPER-SMT_2_NC_TRACE_SILK  [SMT-JUMPER_2_NC_TRACE_SILK]  20.83,28.8 0 bottom
SCX1  JUMPER-SMT_2_NC_TRACE_SILK  [SMT-JUMPER_2_NC_TRACE_SILK]  46.74,28.8 0 bottom
SCX2  JUMPER-SMT_2_NC_TRACE_SILK  [SMT-JUMPER_2_NC_TRACE_SILK]  72.64,28.8 0 bottom
SCX3  JUMPER-SMT_2_NC_TRACE_SILK  [SMT-JUMPER_2_NC_TRACE_SILK]  98.55,28.8 0 bottom
SCX4  JUMPER-SMT_2_NC_TRACE_SILK  [SMT-JUMPER_2_NC_TRACE_SILK]  124.46,28.8 0 bottom
SCX5  JUMPER-SMT_2_NC_TRACE_SILK  [SMT-JUMPER_2_NC_TRACE_SILK]  150.37,28.8 0 bottom
SCX6  JUMPER-SMT_2_NC_TRACE_SILK  [SMT-JUMPER_2_NC_TRACE_SILK]  20.83,54.71 0 bottom
SCX7  JUMPER-SMT_2_NC_TRACE_SILK  [SMT-JUMPER_2_NC_TRACE_SILK]  46.74,54.71 0 bottom
SCX8  JUMPER-SMT_2_NC_TRACE_SILK  [SMT-JUMPER_2_NC_TRACE_SILK]  72.64,54.71 0 bottom
SCX9  JUMPER-SMT_2_NC_TRACE_SILK  [SMT-JUMPER_2_NC_TRACE_SILK]  98.55,54.71 0 bottom
SCX10  JUMPER-SMT_2_NC_TRACE_SILK  [SMT-JUMPER_2_NC_TRACE_SILK]  124.46,54.71 0 bottom
SCX11  JUMPER-SMT_2_NC_TRACE_SILK  [SMT-JUMPER_2_NC_TRACE_SILK]  150.37,54.71 0 bottom
SCX12  JUMPER-SMT_2_NC_TRACE_SILK  [SMT-JUMPER_2_NC_TRACE_SILK]  20.83,80.62 0 bottom
SCX13  JUMPER-SMT_2_NC_TRACE_SILK  [SMT-JUMPER_2_NC_TRACE_SILK]  46.74,80.62 0 bottom
SCX14  JUMPER-SMT_2_NC_TRACE_SILK  [SMT-JUMPER_2_NC_TRACE_SILK]  72.64,80.62 0 bottom
SCX15  JUMPER-SMT_2_NC_TRACE_SILK  [SMT-JUMPER_2_NC_TRACE_SILK]  98.55,80.62 0 bottom
SCX16  JUMPER-SMT_2_NC_TRACE_SILK  [SMT-JUMPER_2_NC_TRACE_SILK]  124.46,80.62 0 bottom
SCX17  JUMPER-SMT_2_NC_TRACE_SILK  [SMT-JUMPER_2_NC_TRACE_SILK]  150.37,80.62 0 bottom
SCX18  JUMPER-SMT_2_NC_TRACE_SILK  [SMT-JUMPER_2_NC_TRACE_SILK]  20.83,106.53 0 bottom
SCX19  JUMPER-SMT_2_NC_TRACE_SILK  [SMT-JUMPER_2_NC_TRACE_SILK]  46.74,106.53 0 bottom
SCX20  JUMPER-SMT_2_NC_TRACE_SILK  [SMT-JUMPER_2_NC_TRACE_SILK]  72.64,106.53 0 bottom
SCX21  JUMPER-SMT_2_NC_TRACE_SILK  [SMT-JUMPER_2_NC_TRACE_SILK]  98.55,106.53 0 bottom
SCX22  JUMPER-SMT_2_NC_TRACE_SILK  [SMT-JUMPER_2_NC_TRACE_SILK]  124.46,106.53 0 bottom
SCX23  JUMPER-SMT_2_NC_TRACE_SILK  [SMT-JUMPER_2_NC_TRACE_SILK]  150.37,106.53 0 bottom
SDX  JUMPER-SMT_2_NC_TRACE_SILK  [SMT-JUMPER_2_NC_TRACE_SILK]  23.34,28.78 180 bottom
SDX1  JUMPER-SMT_2_NC_TRACE_SILK  [SMT-JUMPER_2_NC_TRACE_SILK]  49.25,28.78 180 bottom
SDX2  JUMPER-SMT_2_NC_TRACE_SILK  [SMT-JUMPER_2_NC_TRACE_SILK]  75.16,28.78 180 bottom
SDX3  JUMPER-SMT_2_NC_TRACE_SILK  [SMT-JUMPER_2_NC_TRACE_SILK]  101.07,28.78 180 bottom
SDX4  JUMPER-SMT_2_NC_TRACE_SILK  [SMT-JUMPER_2_NC_TRACE_SILK]  126.97,28.78 180 bottom
SDX5  JUMPER-SMT_2_NC_TRACE_SILK  [SMT-JUMPER_2_NC_TRACE_SILK]  152.88,28.78 180 bottom
SDX6  JUMPER-SMT_2_NC_TRACE_SILK  [SMT-JUMPER_2_NC_TRACE_SILK]  23.34,54.69 180 bottom
SDX7  JUMPER-SMT_2_NC_TRACE_SILK  [SMT-JUMPER_2_NC_TRACE_SILK]  49.25,54.69 180 bottom
SDX8  JUMPER-SMT_2_NC_TRACE_SILK  [SMT-JUMPER_2_NC_TRACE_SILK]  75.16,54.69 180 bottom
SDX9  JUMPER-SMT_2_NC_TRACE_SILK  [SMT-JUMPER_2_NC_TRACE_SILK]  101.07,54.69 180 bottom
SDX10  JUMPER-SMT_2_NC_TRACE_SILK  [SMT-JUMPER_2_NC_TRACE_SILK]  126.97,54.69 180 bottom
SDX11  JUMPER-SMT_2_NC_TRACE_SILK  [SMT-JUMPER_2_NC_TRACE_SILK]  152.88,54.69 180 bottom
SDX12  JUMPER-SMT_2_NC_TRACE_SILK  [SMT-JUMPER_2_NC_TRACE_SILK]  23.34,80.59 180 bottom
SDX13  JUMPER-SMT_2_NC_TRACE_SILK  [SMT-JUMPER_2_NC_TRACE_SILK]  49.25,80.59 180 bottom
SDX14  JUMPER-SMT_2_NC_TRACE_SILK  [SMT-JUMPER_2_NC_TRACE_SILK]  75.16,80.59 180 bottom
SDX15  JUMPER-SMT_2_NC_TRACE_SILK  [SMT-JUMPER_2_NC_TRACE_SILK]  101.07,80.59 180 bottom
SDX16  JUMPER-SMT_2_NC_TRACE_SILK  [SMT-JUMPER_2_NC_TRACE_SILK]  126.97,80.59 180 bottom
SDX17  JUMPER-SMT_2_NC_TRACE_SILK  [SMT-JUMPER_2_NC_TRACE_SILK]  152.88,80.59 180 bottom
SDX18  JUMPER-SMT_2_NC_TRACE_SILK  [SMT-JUMPER_2_NC_TRACE_SILK]  23.34,106.5 180 bottom
SDX19  JUMPER-SMT_2_NC_TRACE_SILK  [SMT-JUMPER_2_NC_TRACE_SILK]  49.25,106.5 180 bottom
SDX20  JUMPER-SMT_2_NC_TRACE_SILK  [SMT-JUMPER_2_NC_TRACE_SILK]  75.16,106.5 180 bottom
SDX21  JUMPER-SMT_2_NC_TRACE_SILK  [SMT-JUMPER_2_NC_TRACE_SILK]  101.07,106.5 180 bottom
SDX22  JUMPER-SMT_2_NC_TRACE_SILK  [SMT-JUMPER_2_NC_TRACE_SILK]  126.97,106.5 180 bottom
SDX23  JUMPER-SMT_2_NC_TRACE_SILK  [SMT-JUMPER_2_NC_TRACE_SILK]  152.88,106.5 180 bottom
STANDOFF1  STAND-OFFTIGHT  [STAND-OFF-TIGHT]  9.4,29.72 0 top
STANDOFF2  STAND-OFFTIGHT  [STAND-OFF-TIGHT]  9.4,9.4 0 top
STANDOFF3  STAND-OFFTIGHT  [STAND-OFF-TIGHT]  29.72,9.4 0 top
STANDOFF4  STAND-OFFTIGHT  [STAND-OFF-TIGHT]  29.72,29.72 0 top
STANDOFF5  STAND-OFFTIGHT  [STAND-OFF-TIGHT]  35.31,29.72 0 top
STANDOFF6  STAND-OFFTIGHT  [STAND-OFF-TIGHT]  35.31,9.4 0 top
STANDOFF7  STAND-OFFTIGHT  [STAND-OFF-TIGHT]  55.63,9.4 0 top
STANDOFF8  STAND-OFFTIGHT  [STAND-OFF-TIGHT]  55.63,29.72 0 top
STANDOFF9  STAND-OFFTIGHT  [STAND-OFF-TIGHT]  61.21,29.72 0 top
STANDOFF10  STAND-OFFTIGHT  [STAND-OFF-TIGHT]  61.21,9.4 0 top
STANDOFF11  STAND-OFFTIGHT  [STAND-OFF-TIGHT]  81.53,9.4 0 top
STANDOFF12  STAND-OFFTIGHT  [STAND-OFF-TIGHT]  81.53,29.72 0 top
STANDOFF13  STAND-OFFTIGHT  [STAND-OFF-TIGHT]  87.12,29.72 0 top
STANDOFF14  STAND-OFFTIGHT  [STAND-OFF-TIGHT]  87.12,9.4 0 top
STANDOFF15  STAND-OFFTIGHT  [STAND-OFF-TIGHT]  107.44,9.4 0 top
STANDOFF16  STAND-OFFTIGHT  [STAND-OFF-TIGHT]  107.44,29.72 0 top
STANDOFF17  STAND-OFFTIGHT  [STAND-OFF-TIGHT]  113.03,29.72 0 top
STANDOFF18  STAND-OFFTIGHT  [STAND-OFF-TIGHT]  113.03,9.4 0 top
STANDOFF19  STAND-OFFTIGHT  [STAND-OFF-TIGHT]  133.35,9.4 0 top
STANDOFF20  STAND-OFFTIGHT  [STAND-OFF-TIGHT]  133.35,29.72 0 top
STANDOFF21  STAND-OFFTIGHT  [STAND-OFF-TIGHT]  138.94,29.72 0 top
STANDOFF22  STAND-OFFTIGHT  [STAND-OFF-TIGHT]  138.94,9.4 0 top
STANDOFF23  STAND-OFFTIGHT  [STAND-OFF-TIGHT]  159.26,9.4 0 top
STANDOFF24  STAND-OFFTIGHT  [STAND-OFF-TIGHT]  159.26,29.72 0 top
STANDOFF25  STAND-OFFTIGHT  [STAND-OFF-TIGHT]  9.4,55.63 0 top
STANDOFF26  STAND-OFFTIGHT  [STAND-OFF-TIGHT]  9.4,35.31 0 top
STANDOFF27  STAND-OFFTIGHT  [STAND-OFF-TIGHT]  29.72,35.31 0 top
STANDOFF28  STAND-OFFTIGHT  [STAND-OFF-TIGHT]  29.72,55.63 0 top
STANDOFF29  STAND-OFFTIGHT  [STAND-OFF-TIGHT]  35.31,55.63 0 top
STANDOFF30  STAND-OFFTIGHT  [STAND-OFF-TIGHT]  35.31,35.31 0 top
STANDOFF31  STAND-OFFTIGHT  [STAND-OFF-TIGHT]  55.63,35.31 0 top
STANDOFF32  STAND-OFFTIGHT  [STAND-OFF-TIGHT]  55.63,55.63 0 top
STANDOFF33  STAND-OFFTIGHT  [STAND-OFF-TIGHT]  61.21,55.63 0 top
STANDOFF34  STAND-OFFTIGHT  [STAND-OFF-TIGHT]  61.21,35.31 0 top
STANDOFF35  STAND-OFFTIGHT  [STAND-OFF-TIGHT]  81.53,35.31 0 top
STANDOFF36  STAND-OFFTIGHT  [STAND-OFF-TIGHT]  81.53,55.63 0 top
STANDOFF37  STAND-OFFTIGHT  [STAND-OFF-TIGHT]  87.12,55.63 0 top
STANDOFF38  STAND-OFFTIGHT  [STAND-OFF-TIGHT]  87.12,35.31 0 top
STANDOFF39  STAND-OFFTIGHT  [STAND-OFF-TIGHT]  107.44,35.31 0 top
STANDOFF40  STAND-OFFTIGHT  [STAND-OFF-TIGHT]  107.44,55.63 0 top
STANDOFF41  STAND-OFFTIGHT  [STAND-OFF-TIGHT]  113.03,55.63 0 top
STANDOFF42  STAND-OFFTIGHT  [STAND-OFF-TIGHT]  113.03,35.31 0 top
STANDOFF43  STAND-OFFTIGHT  [STAND-OFF-TIGHT]  133.35,35.31 0 top
STANDOFF44  STAND-OFFTIGHT  [STAND-OFF-TIGHT]  133.35,55.63 0 top
STANDOFF45  STAND-OFFTIGHT  [STAND-OFF-TIGHT]  138.94,55.63 0 top
STANDOFF46  STAND-OFFTIGHT  [STAND-OFF-TIGHT]  138.94,35.31 0 top
STANDOFF47  STAND-OFFTIGHT  [STAND-OFF-TIGHT]  159.26,35.31 0 top
STANDOFF48  STAND-OFFTIGHT  [STAND-OFF-TIGHT]  159.26,55.63 0 top
STANDOFF49  STAND-OFFTIGHT  [STAND-OFF-TIGHT]  9.4,81.53 0 top
STANDOFF50  STAND-OFFTIGHT  [STAND-OFF-TIGHT]  9.4,61.21 0 top
STANDOFF51  STAND-OFFTIGHT  [STAND-OFF-TIGHT]  29.72,61.21 0 top
STANDOFF52  STAND-OFFTIGHT  [STAND-OFF-TIGHT]  29.72,81.53 0 top
STANDOFF53  STAND-OFFTIGHT  [STAND-OFF-TIGHT]  35.31,81.53 0 top
STANDOFF54  STAND-OFFTIGHT  [STAND-OFF-TIGHT]  35.31,61.21 0 top
STANDOFF55  STAND-OFFTIGHT  [STAND-OFF-TIGHT]  55.63,61.21 0 top
STANDOFF56  STAND-OFFTIGHT  [STAND-OFF-TIGHT]  55.63,81.53 0 top
STANDOFF57  STAND-OFFTIGHT  [STAND-OFF-TIGHT]  61.21,81.53 0 top
STANDOFF58  STAND-OFFTIGHT  [STAND-OFF-TIGHT]  61.21,61.21 0 top
STANDOFF59  STAND-OFFTIGHT  [STAND-OFF-TIGHT]  81.53,61.21 0 top
STANDOFF60  STAND-OFFTIGHT  [STAND-OFF-TIGHT]  81.53,81.53 0 top
STANDOFF61  STAND-OFFTIGHT  [STAND-OFF-TIGHT]  87.12,81.53 0 top
STANDOFF62  STAND-OFFTIGHT  [STAND-OFF-TIGHT]  87.12,61.21 0 top
STANDOFF63  STAND-OFFTIGHT  [STAND-OFF-TIGHT]  107.44,61.21 0 top
STANDOFF64  STAND-OFFTIGHT  [STAND-OFF-TIGHT]  107.44,81.53 0 top
STANDOFF65  STAND-OFFTIGHT  [STAND-OFF-TIGHT]  113.03,81.53 0 top
STANDOFF66  STAND-OFFTIGHT  [STAND-OFF-TIGHT]  113.03,61.21 0 top
STANDOFF67  STAND-OFFTIGHT  [STAND-OFF-TIGHT]  133.35,61.21 0 top
STANDOFF68  STAND-OFFTIGHT  [STAND-OFF-TIGHT]  133.35,81.53 0 top
STANDOFF69  STAND-OFFTIGHT  [STAND-OFF-TIGHT]  138.94,81.53 0 top
STANDOFF70  STAND-OFFTIGHT  [STAND-OFF-TIGHT]  138.94,61.21 0 top
STANDOFF71  STAND-OFFTIGHT  [STAND-OFF-TIGHT]  159.26,61.21 0 top
STANDOFF72  STAND-OFFTIGHT  [STAND-OFF-TIGHT]  159.26,81.53 0 top
STANDOFF73  STAND-OFFTIGHT  [STAND-OFF-TIGHT]  9.4,107.44 0 top
STANDOFF74  STAND-OFFTIGHT  [STAND-OFF-TIGHT]  9.4,87.12 0 top
STANDOFF75  STAND-OFFTIGHT  [STAND-OFF-TIGHT]  29.72,87.12 0 top
STANDOFF76  STAND-OFFTIGHT  [STAND-OFF-TIGHT]  29.72,107.44 0 top
STANDOFF77  STAND-OFFTIGHT  [STAND-OFF-TIGHT]  35.31,107.44 0 top
STANDOFF78  STAND-OFFTIGHT  [STAND-OFF-TIGHT]  35.31,87.12 0 top
STANDOFF79  STAND-OFFTIGHT  [STAND-OFF-TIGHT]  55.63,87.12 0 top
STANDOFF80  STAND-OFFTIGHT  [STAND-OFF-TIGHT]  55.63,107.44 0 top
STANDOFF81  STAND-OFFTIGHT  [STAND-OFF-TIGHT]  61.21,107.44 0 top
STANDOFF82  STAND-OFFTIGHT  [STAND-OFF-TIGHT]  61.21,87.12 0 top
STANDOFF83  STAND-OFFTIGHT  [STAND-OFF-TIGHT]  81.53,87.12 0 top
STANDOFF84  STAND-OFFTIGHT  [STAND-OFF-TIGHT]  81.53,107.44 0 top
STANDOFF85  STAND-OFFTIGHT  [STAND-OFF-TIGHT]  87.12,107.44 0 top
STANDOFF86  STAND-OFFTIGHT  [STAND-OFF-TIGHT]  87.12,87.12 0 top
STANDOFF87  STAND-OFFTIGHT  [STAND-OFF-TIGHT]  107.44,87.12 0 top
STANDOFF88  STAND-OFFTIGHT  [STAND-OFF-TIGHT]  107.44,107.44 0 top
STANDOFF89  STAND-OFFTIGHT  [STAND-OFF-TIGHT]  113.03,107.44 0 top
STANDOFF90  STAND-OFFTIGHT  [STAND-OFF-TIGHT]  113.03,87.12 0 top
STANDOFF91  STAND-OFFTIGHT  [STAND-OFF-TIGHT]  133.35,87.12 0 top
STANDOFF92  STAND-OFFTIGHT  [STAND-OFF-TIGHT]  133.35,107.44 0 top
STANDOFF93  STAND-OFFTIGHT  [STAND-OFF-TIGHT]  138.94,107.44 0 top
STANDOFF94  STAND-OFFTIGHT  [STAND-OFF-TIGHT]  138.94,87.12 0 top
STANDOFF95  STAND-OFFTIGHT  [STAND-OFF-TIGHT]  159.26,87.12 0 top
STANDOFF96  STAND-OFFTIGHT  [STAND-OFF-TIGHT]  159.26,107.44 0 top
U1  LSM6DS0  [LGA14L]  19.56,19.56 180 top
U2  LSM6DS0  [LGA14L]  45.47,19.56 180 top
U3  LSM6DS0  [LGA14L]  71.37,19.56 180 top
U4  LSM6DS0  [LGA14L]  97.28,19.56 180 top
U5  LSM6DS0  [LGA14L]  123.19,19.56 180 top
U6  LSM6DS0  [LGA14L]  149.1,19.56 180 top
U7  LSM6DS0  [LGA14L]  19.56,45.47 180 top
U8  LSM6DS0  [LGA14L]  45.47,45.47 180 top
U9  LSM6DS0  [LGA14L]  71.37,45.47 180 top
U10  LSM6DS0  [LGA14L]  97.28,45.47 180 top
U11  LSM6DS0  [LGA14L]  123.19,45.47 180 top
U12  LSM6DS0  [LGA14L]  149.1,45.47 180 top
U13  LSM6DS0  [LGA14L]  19.56,71.37 180 top
U14  LSM6DS0  [LGA14L]  45.47,71.37 180 top
U15  LSM6DS0  [LGA14L]  71.37,71.37 180 top
U16  LSM6DS0  [LGA14L]  97.28,71.37 180 top
U17  LSM6DS0  [LGA14L]  123.19,71.37 180 top
U18  LSM6DS0  [LGA14L]  149.1,71.37 180 top
U19  LSM6DS0  [LGA14L]  19.56,97.28 180 top
U20  LSM6DS0  [LGA14L]  45.47,97.28 180 top
U21  LSM6DS0  [LGA14L]  71.37,97.28 180 top
U22  LSM6DS0  [LGA14L]  97.28,97.28 180 top
U23  LSM6DS0  [LGA14L]  123.19,97.28 180 top
U24  LSM6DS0  [LGA14L]  149.1,97.28 180 top
U$1  [#3V3#1]  15.75,10.82 90 top
U$2  [#GND#0]  13.23,10.85 90 top
U$3  [##CS##7]  25.93,10.21 90 top
U$4  [#SDA#4]  18.29,10.82 90 top
U$5  [#SCL#5]  20.85,10.67 90 top
U$6  [#SDO#6]  23.39,10.79 90 top
U$7  [#INT1#9]  15.72,28.24 90 top
U$8  [#INT2#9]  13.18,28.12 90 top
U$9  [#OCS#8]  18.29,28.4 90 top
U$10  [#SCX#9]  20.88,28.35 90 top
U$11  [#SDIX#11]  23.37,28.17 90 top
U$12  [LSM6DS011]  14.45,18.77 270 bottom
U$13  [#0X6A#11]  21.59,18.97 0 bottom
U$14  [#0X6B#11]  21.67,20.14 0 bottom
U$15  [#3V3#1]  15.75,10.82 270 bottom
U$16  [#LED#11]  30.48,23.85 0 bottom
U$17  [#GND#0]  13.23,10.85 270 bottom
U$18  [#SDO#7]  23.39,10.79 270 bottom
U$19  [#INT1#9]  15.72,28.24 270 bottom
U$20  [#OCS#7]  18.29,28.4 270 bottom
U$21  [#INT2#9]  13.18,28.12 270 bottom
U$22  [#SCL#5]  20.85,10.67 270 bottom
U$23  [#SCX#8]  20.85,25.93 270 bottom
U$24  [#SDOX#12]  25.88,27.84 90 top
U$25  [#I2C#11]  19.68,15.32 0 bottom
U$26  [#SDI#4]  18.29,10.46 270 bottom
U$27  [##CS##8]  25.93,10.21 270 bottom
U$28  [PWR8]  28.5,24.89 90 top
U$29  [SFE_LOGO_FLAME_.1]  8.76,26.29 0 top
U$30  [LSM6DS011]  11.71,14.33 0 top
U$31  [6DOF12]  12.7,18.8 270 bottom
U$32  [#SDOX#12]  25.88,27.86 270 bottom
U$33  [#SDIX#11]  23.37,25.68 270 bottom
U$34  [#3V3#1]  41.66,10.82 90 top
U$35  [#GND#0]  39.14,10.85 90 top
U$36  [#SDA#4]  44.2,10.82 90 top
U$37  [#SCL#5]  46.76,10.67 90 top
U$38  [#OCS#8]  44.2,28.4 90 top
U$39  [#SCX#9]  46.79,28.35 90 top
U$40  [LSM6DS011]  40.36,18.77 270 bottom
U$41  [#3V3#1]  41.66,10.82 270 bottom
U$42  [#GND#0]  39.14,10.85 270 bottom
U$43  [#OCS#7]  44.2,28.4 270 bottom
U$44  [#SCL#5]  46.76,10.67 270 bottom
U$45  [#SCX#8]  46.76,25.93 270 bottom
U$46  [#LED#11]  56.39,23.85 0 bottom
U$47  [#0X6A#11]  47.5,18.97 0 bottom
U$48  [#0X6B#11]  47.57,20.14 0 bottom
U$49  [#I2C#11]  45.59,15.32 0 bottom
U$50  [PWR8]  54.41,24.89 90 top
U$51  [#INT1#9]  41.63,28.24 90 top
U$52  [#INT2#9]  39.09,28.12 90 top
U$53  [#SDO#6]  49.3,10.79 90 top
U$54  [#SDO#7]  49.3,10.79 270 bottom
U$55  [#INT1#9]  41.63,28.24 270 bottom
U$56  [#INT2#9]  39.09,28.12 270 bottom
U$57  [#SDI#4]  44.2,10.46 270 bottom
U$58  [LSM6DS011]  37.62,14.33 0 top
U$59  [##CS##7]  51.84,10.21 90 top
U$60  [##CS##8]  51.84,10.21 270 bottom
U$61  [6DOF12]  38.61,18.8 270 bottom
U$62  [SFE_LOGO_FLAME_.1]  34.67,26.29 0 top
U$63  [#SDIX#11]  49.28,28.17 90 top
U$64  [#SDOX#12]  51.79,27.84 90 top
U$65  [#SDOX#12]  51.79,27.86 270 bottom
U$66  [#SDIX#11]  49.28,25.68 270 bottom
U$67  [#3V3#1]  67.56,10.82 90 top
U$68  [#GND#0]  65.05,10.85 90 top
U$69  [#SDA#4]  70.1,10.82 90 top
U$70  [#SCL#5]  72.67,10.67 90 top
U$71  [#OCS#8]  70.1,28.4 90 top
U$72  [#SCX#9]  72.69,28.35 90 top
U$73  [LSM6DS011]  66.27,18.77 270 bottom
U$74  [#3V3#1]  67.56,10.82 270 bottom
U$75  [#GND#0]  65.05,10.85 270 bottom
U$76  [#OCS#7]  70.1,28.4 270 bottom
U$77  [#SCL#5]  72.67,10.67 270 bottom
U$78  [#SCX#8]  72.67,25.93 270 bottom
U$79  [#LED#11]  82.3,23.85 0 bottom
U$80  [#0X6A#11]  73.41,18.97 0 bottom
U$81  [#0X6B#11]  73.48,20.14 0 bottom
U$82  [#I2C#11]  71.5,15.32 0 bottom
U$83  [PWR8]  80.31,24.89 90 top
U$84  [#INT1#9]  67.54,28.24 90 top
U$85  [#INT2#9]  65,28.12 90 top
U$86  [#SDO#6]  75.21,10.79 90 top
U$87  [#SDO#7]  75.21,10.79 270 bottom
U$88  [#INT1#9]  67.54,28.24 270 bottom
U$89  [#INT2#9]  65,28.12 270 bottom
U$90  [#SDI#4]  70.1,10.46 270 bottom
U$91  [LSM6DS011]  63.53,14.33 0 top
U$92  [##CS##7]  77.75,10.21 90 top
U$93  [##CS##8]  77.75,10.21 270 bottom
U$94  [6DOF12]  64.52,18.8 270 bottom
U$95  [SFE_LOGO_FLAME_.1]  60.58,26.29 0 top
U$96  [#SDIX#11]  75.18,28.17 90 top
U$97  [#SDOX#12]  77.7,27.84 90 top
U$98  [#SDOX#12]  77.7,27.86 270 bottom
U$99  [#SDIX#11]  75.18,25.68 270 bottom
U$100  [#3V3#1]  93.47,10.82 90 top
U$101  [#GND#0]  90.96,10.85 90 top
U$102  [#SDA#4]  96.01,10.82 90 top
U$103  [#SCL#5]  98.58,10.67 90 top
U$104  [#OCS#8]  96.01,28.4 90 top
U$105  [#SCX#9]  98.6,28.35 90 top
U$106  [LSM6DS011]  92.18,18.77 270 bottom
U$107  [#3V3#1]  93.47,10.82 270 bottom
U$108  [#GND#0]  90.96,10.85 270 bottom
U$109  [#OCS#7]  96.01,28.4 270 bottom
U$110  [#SCL#5]  98.58,10.67 270 bottom
U$111  [#SCX#8]  98.58,25.93 270 bottom
U$112  [#LED#11]  108.2,23.85 0 bottom
U$113  [#0X6A#11]  99.31,18.97 0 bottom
U$114  [#0X6B#11]  99.39,20.14 0 bottom
U$115  [#I2C#11]  97.41,15.32 0 bottom
U$116  [PWR8]  106.22,24.89 90 top
U$117  [#INT1#9]  93.45,28.24 90 top
U$118  [#INT2#9]  90.91,28.12 90 top
U$119  [#SDO#6]  101.12,10.79 90 top
U$120  [#SDO#7]  101.12,10.79 270 bottom
U$121  [#INT1#9]  93.45,28.24 270 bottom
U$122  [#INT2#9]  90.91,28.12 270 bottom
U$123  [#SDI#4]  96.01,10.46 270 bottom
U$124  [LSM6DS011]  89.43,14.33 0 top
U$125  [##CS##7]  103.66,10.21 90 top
U$126  [##CS##8]  103.66,10.21 270 bottom
U$127  [6DOF12]  90.42,18.8 270 bottom
U$128  [SFE_LOGO_FLAME_.1]  86.49,26.29 0 top
U$129  [#SDIX#11]  101.09,28.17 90 top
U$130  [#SDOX#12]  103.61,27.84 90 top
U$131  [#SDOX#12]  103.61,27.86 270 bottom
U$132  [#SDIX#11]  101.09,25.68 270 bottom
U$133  [#3V3#1]  119.38,10.82 90 top
U$134  [#GND#0]  116.87,10.85 90 top
U$135  [#SDA#4]  121.92,10.82 90 top
U$136  [#SCL#5]  124.49,10.67 90 top
U$137  [#OCS#8]  121.92,28.4 90 top
U$138  [#SCX#9]  124.51,28.35 90 top
U$139  [LSM6DS011]  118.08,18.77 270 bottom
U$140  [#3V3#1]  119.38,10.82 270 bottom
U$141  [#GND#0]  116.87,10.85 270 bottom
U$142  [#OCS#7]  121.92,28.4 270 bottom
U$143  [#SCL#5]  124.49,10.67 270 bottom
U$144  [#SCX#8]  124.49,25.93 270 bottom
U$145  [#LED#11]  134.11,23.85 0 bottom
U$146  [#0X6A#11]  125.22,18.97 0 bottom
U$147  [#0X6B#11]  125.3,20.14 0 bottom
U$148  [#I2C#11]  123.32,15.32 0 bottom
U$149  [PWR8]  132.13,24.89 90 top
U$150  [#INT1#9]  119.35,28.24 90 top
U$151  [#INT2#9]  116.81,28.12 90 top
U$152  [#SDO#6]  127.03,10.79 90 top
U$153  [#SDO#7]  127.03,10.79 270 bottom
U$154  [#INT1#9]  119.35,28.24 270 bottom
U$155  [#INT2#9]  116.81,28.12 270 bottom
U$156  [#SDI#4]  121.92,10.46 270 bottom
U$157  [LSM6DS011]  115.34,14.33 0 top
U$158  [##CS##7]  129.57,10.21 90 top
U$159  [##CS##8]  129.57,10.21 270 bottom
U$160  [6DOF12]  116.33,18.8 270 bottom
U$161  [SFE_LOGO_FLAME_.1]  112.4,26.29 0 top
U$162  [#SDIX#11]  127,28.17 90 top
U$163  [#SDOX#12]  129.51,27.84 90 top